# Altium PCB SG_CAN_Board.PcbDoc (part 1 of 2)
Units mil, origin at the board's own origin, x right, y up, seen from the top; angles counter-clockwise.
Board outline 3500 x 2800 mil, 4 copper layers (Top Layer, Int1 (GND), Int2 (PWR), Bottom Layer), stack 53.911 mil thick; 153 components, 115 nets, 475 pads, 128 vias.
Unrouted connection lines stored in the file: 15.
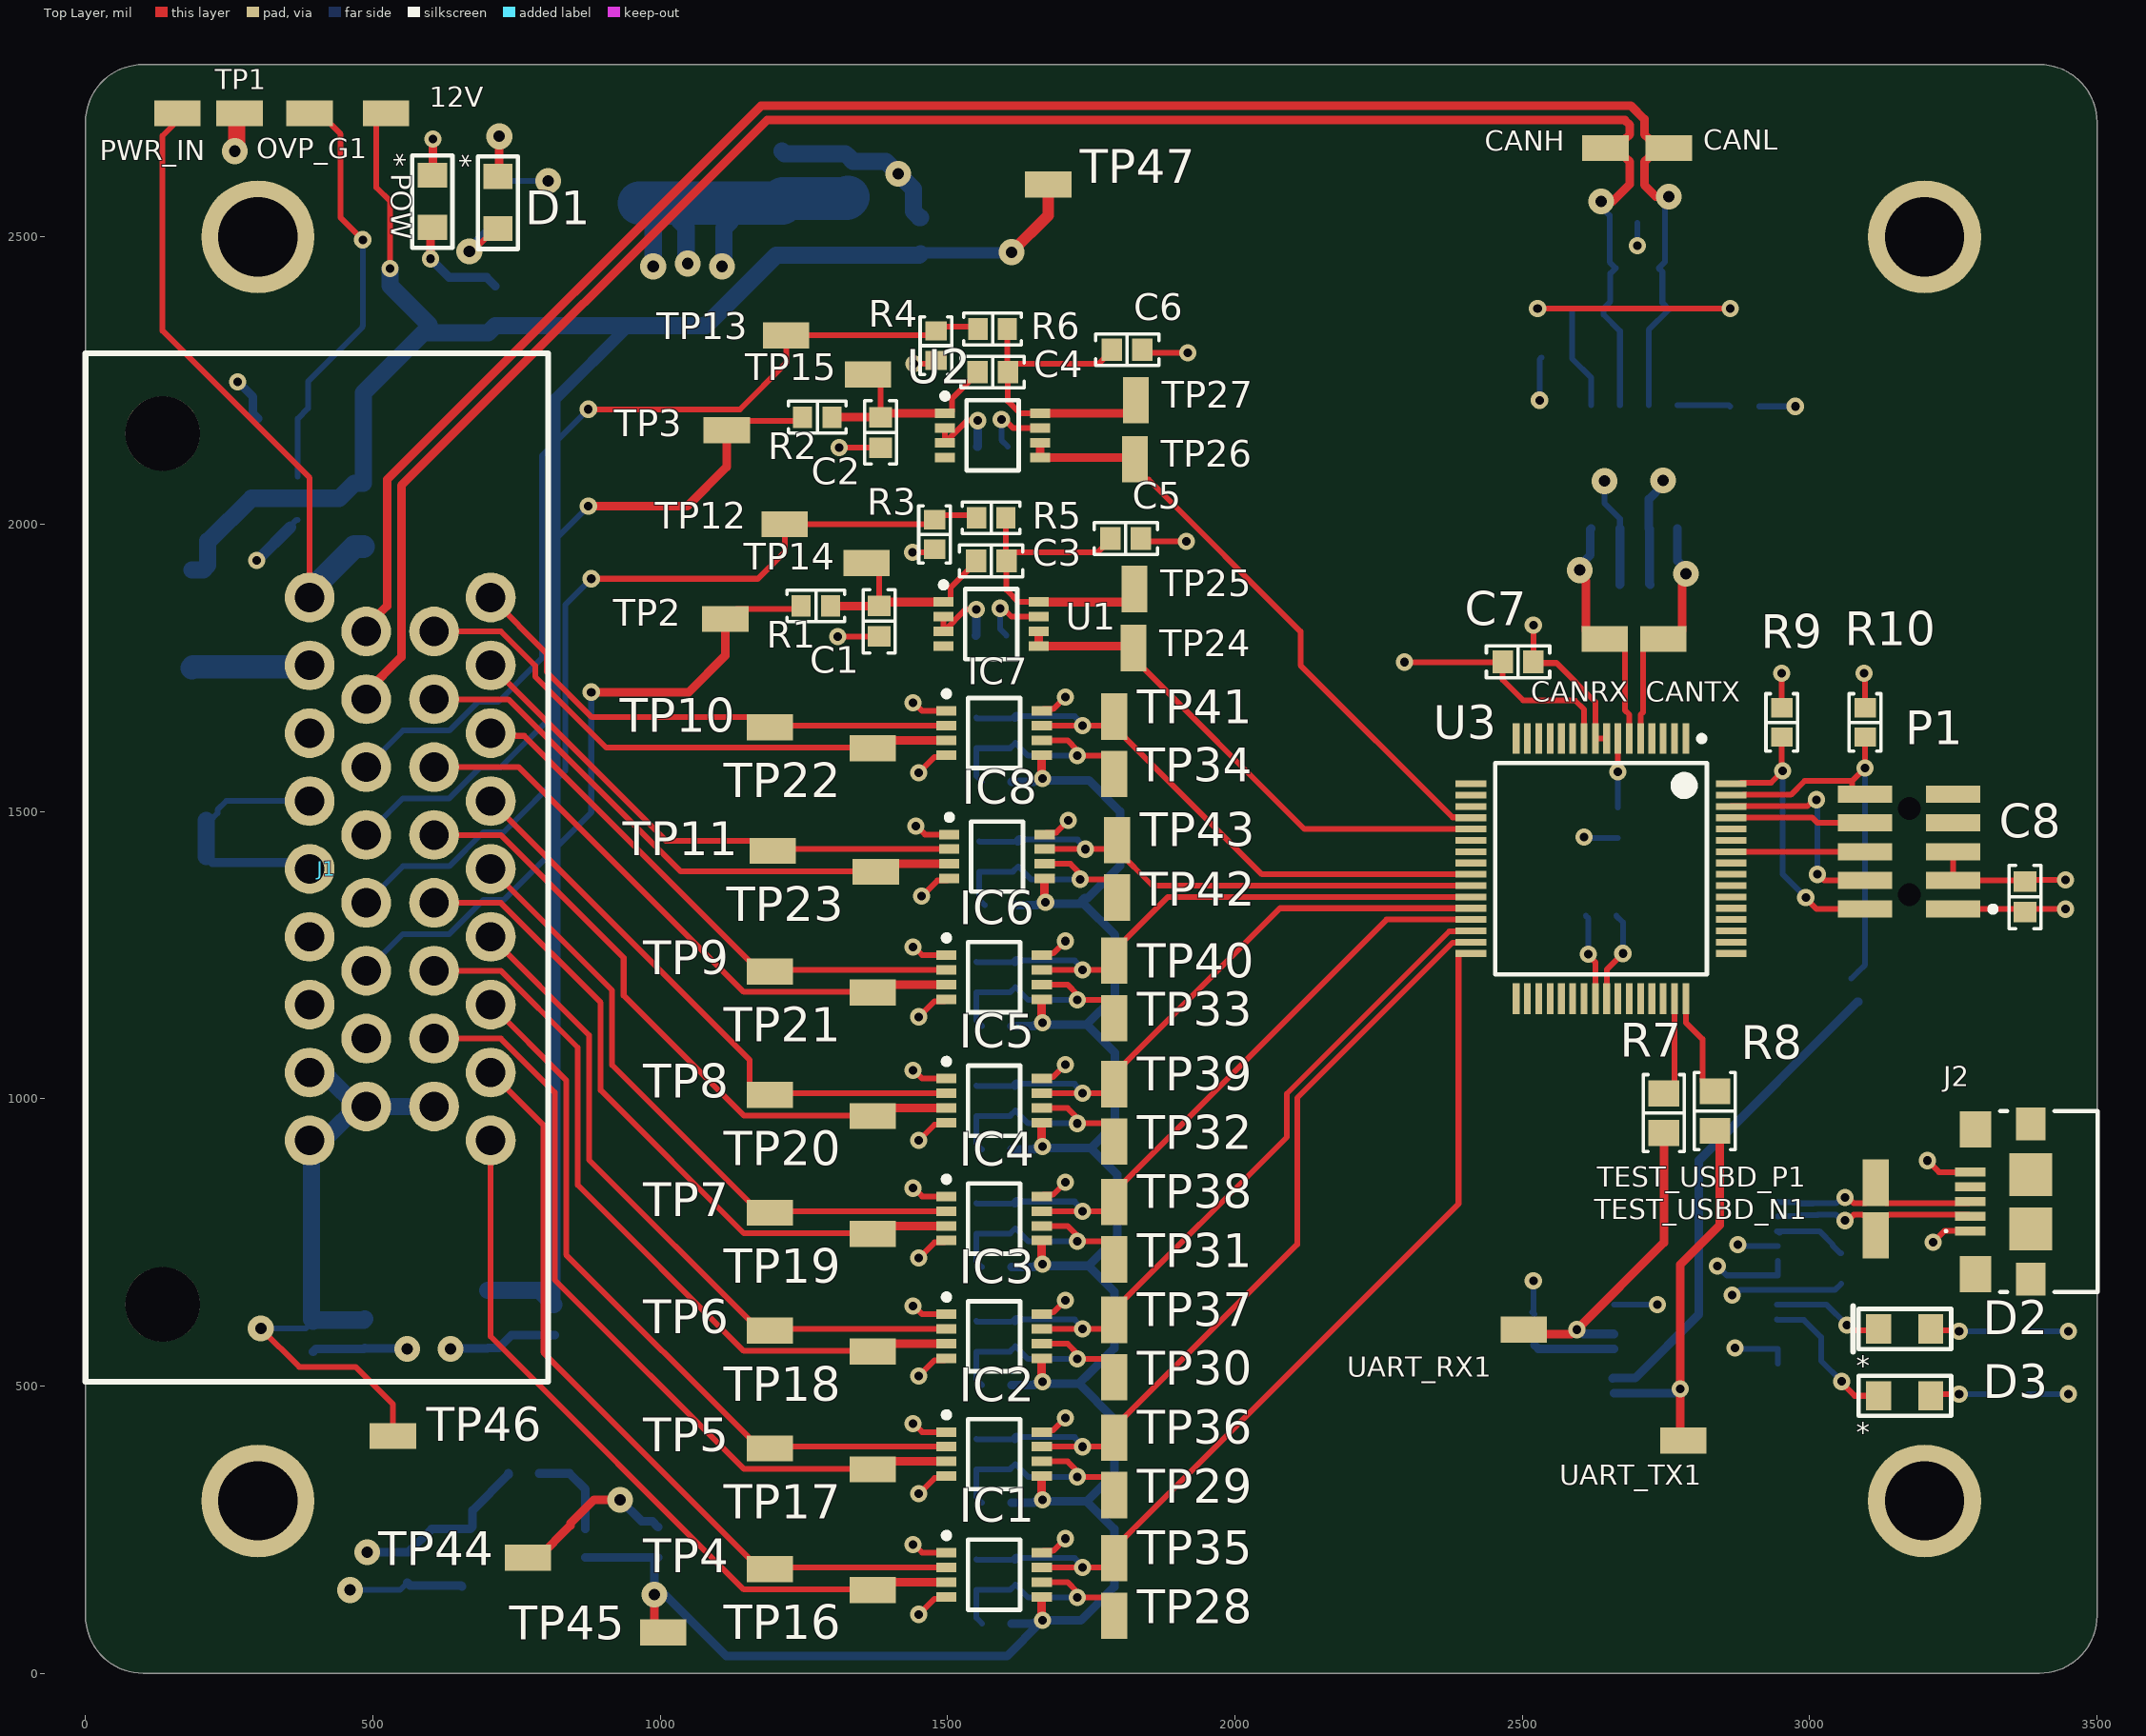
[diagram p0: Top Layer view]
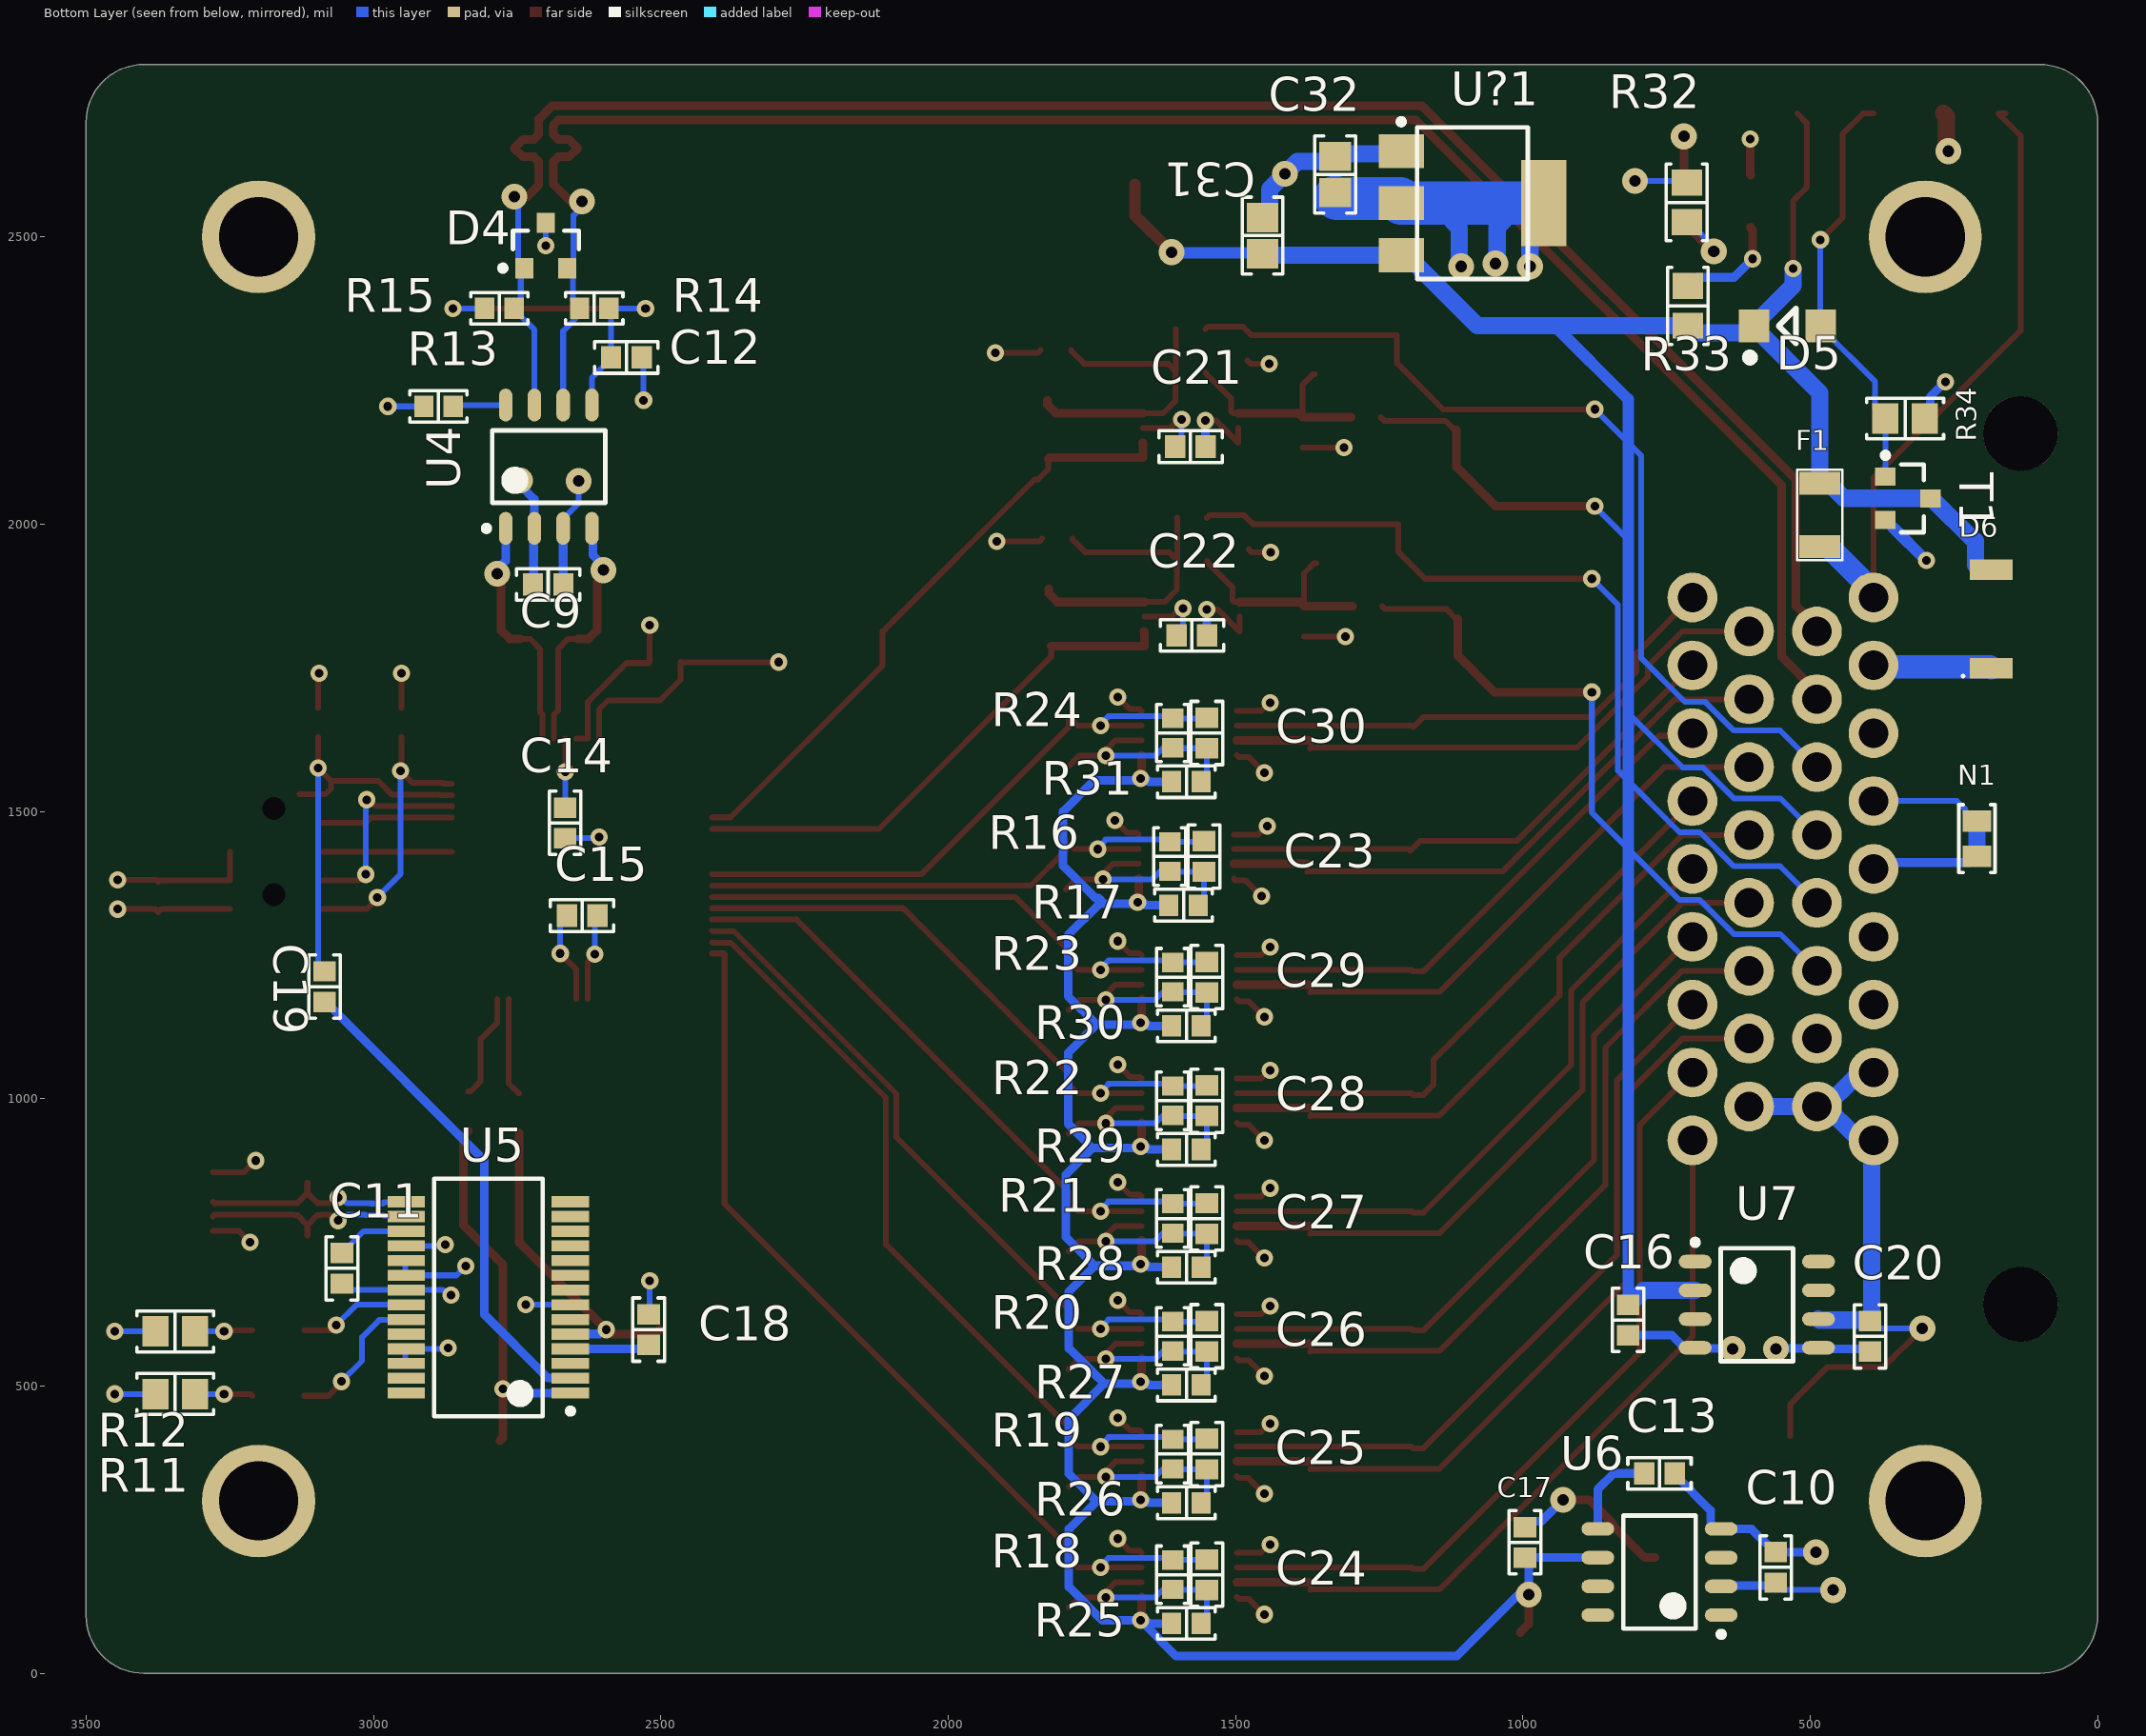
[diagram p1: Bottom Layer view, seen from below]
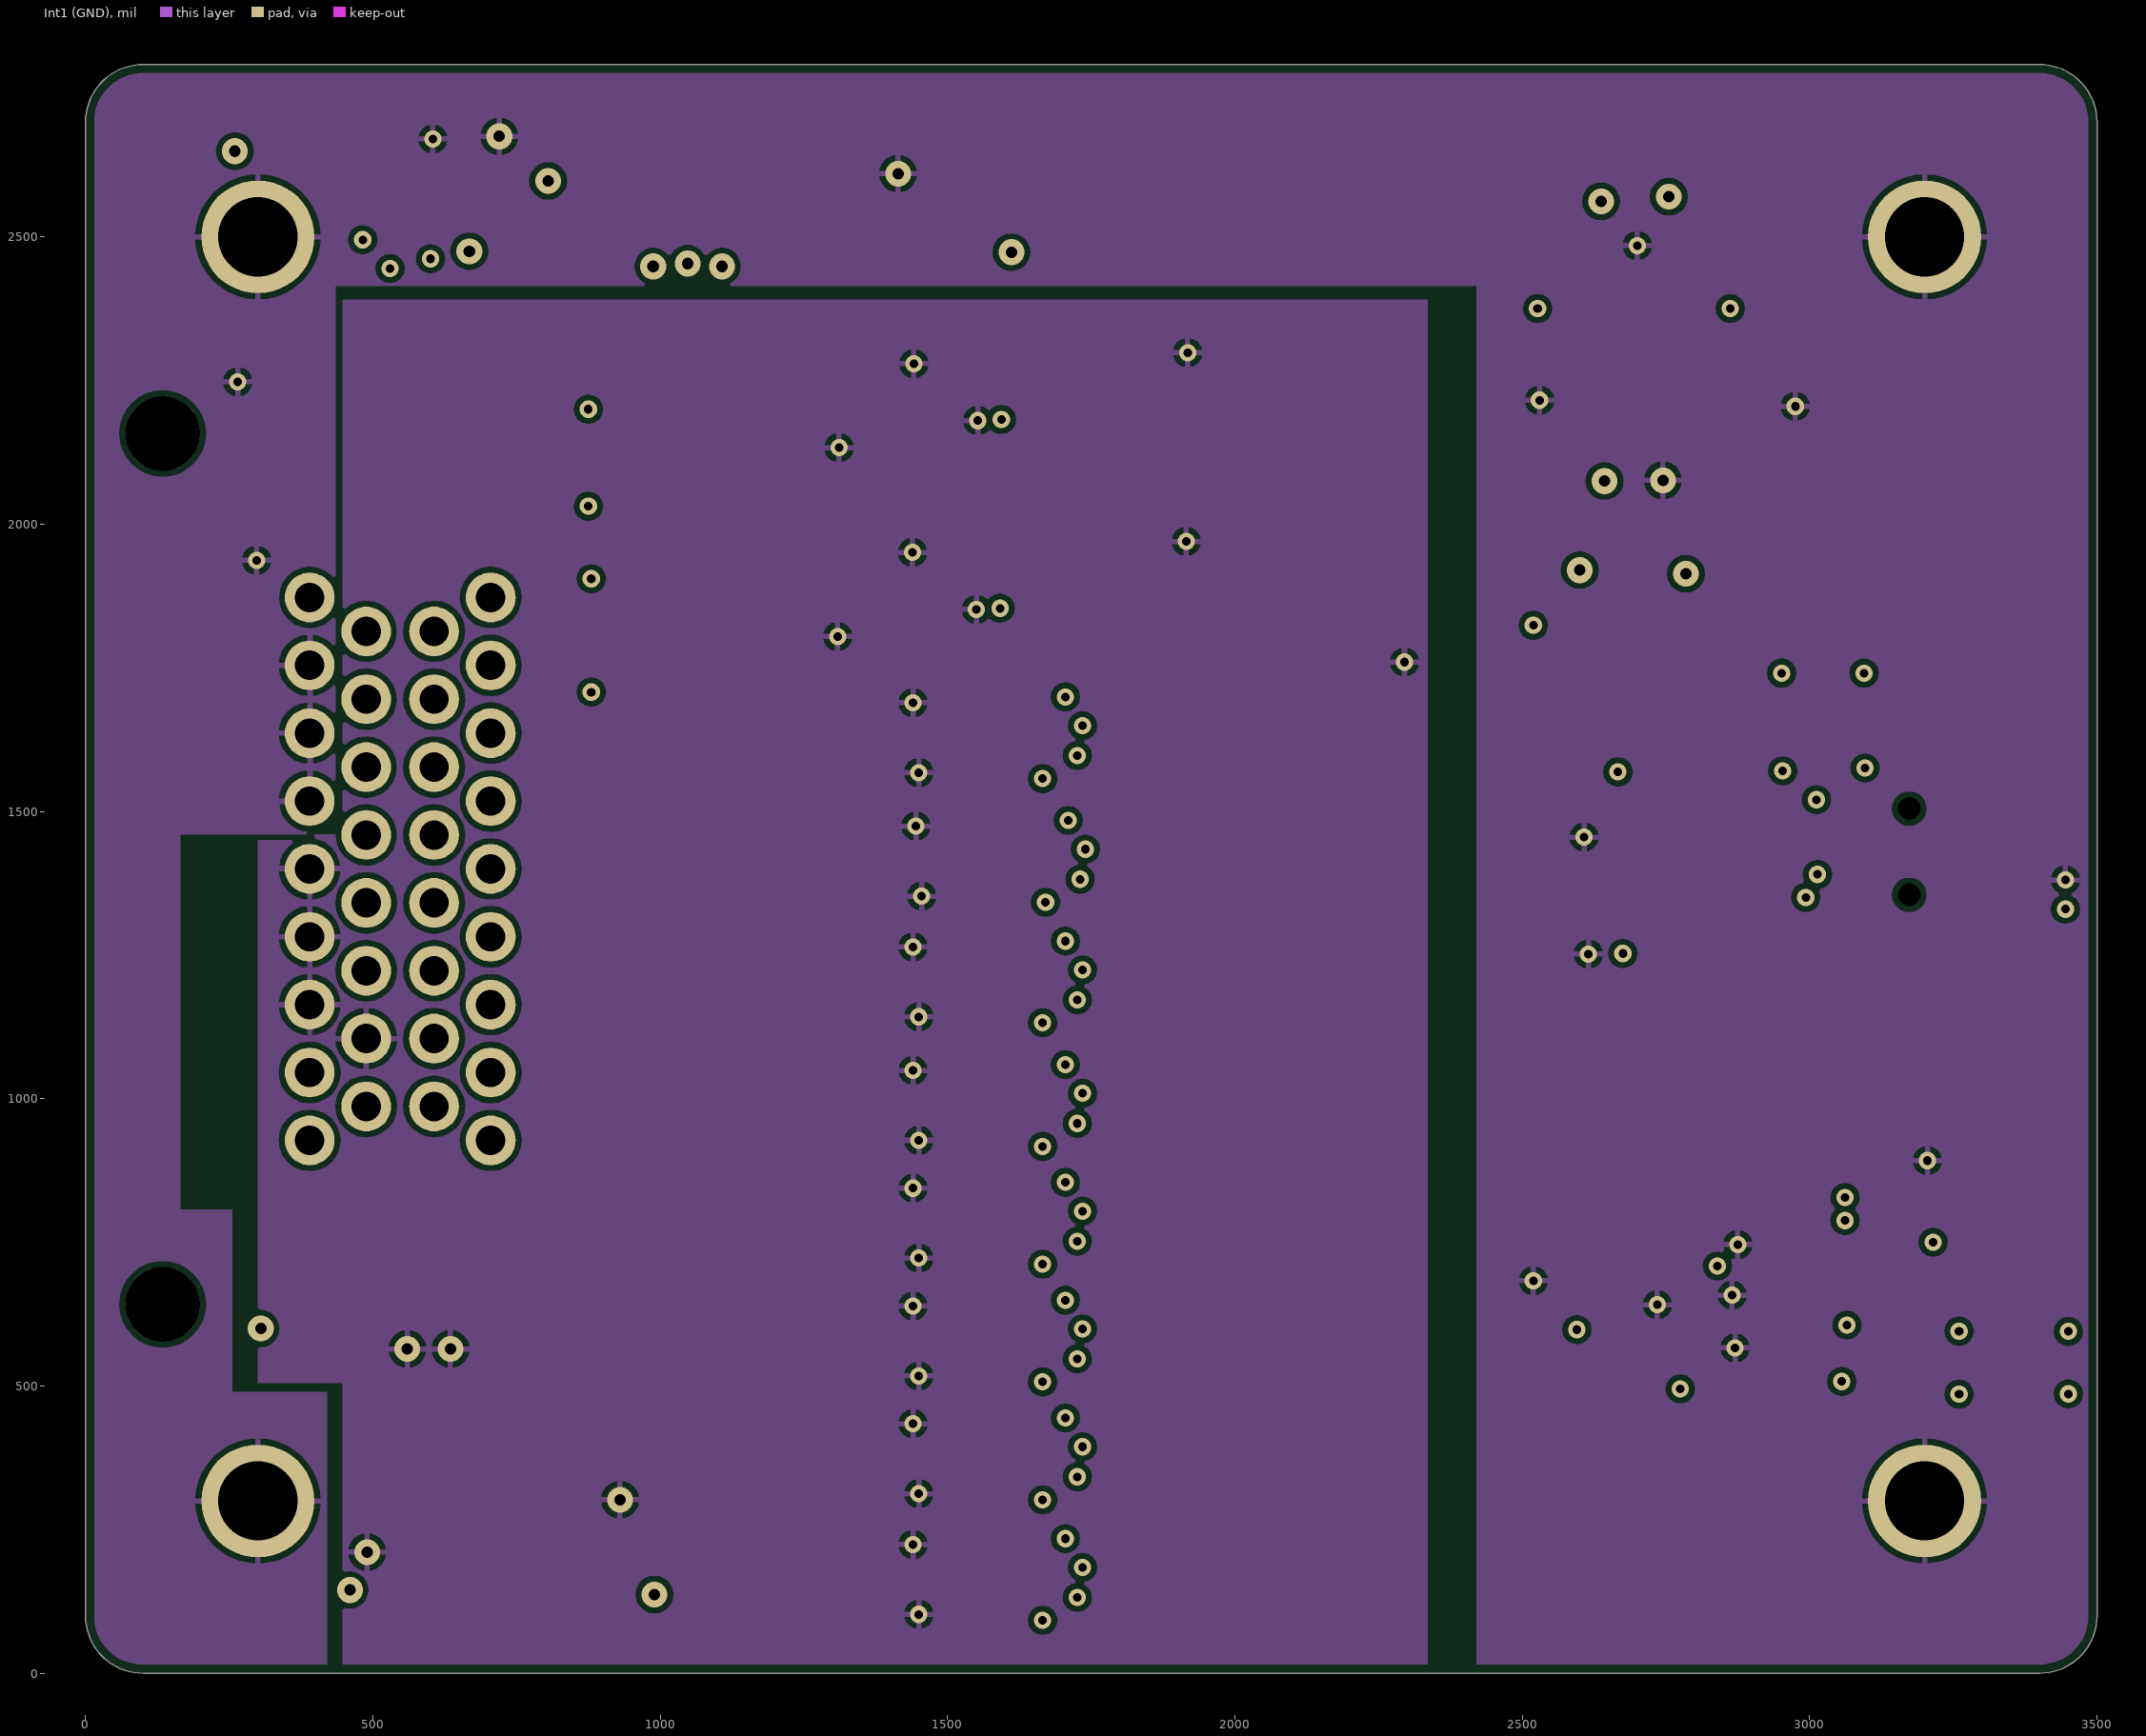
[diagram p2: Int1 (GND)]
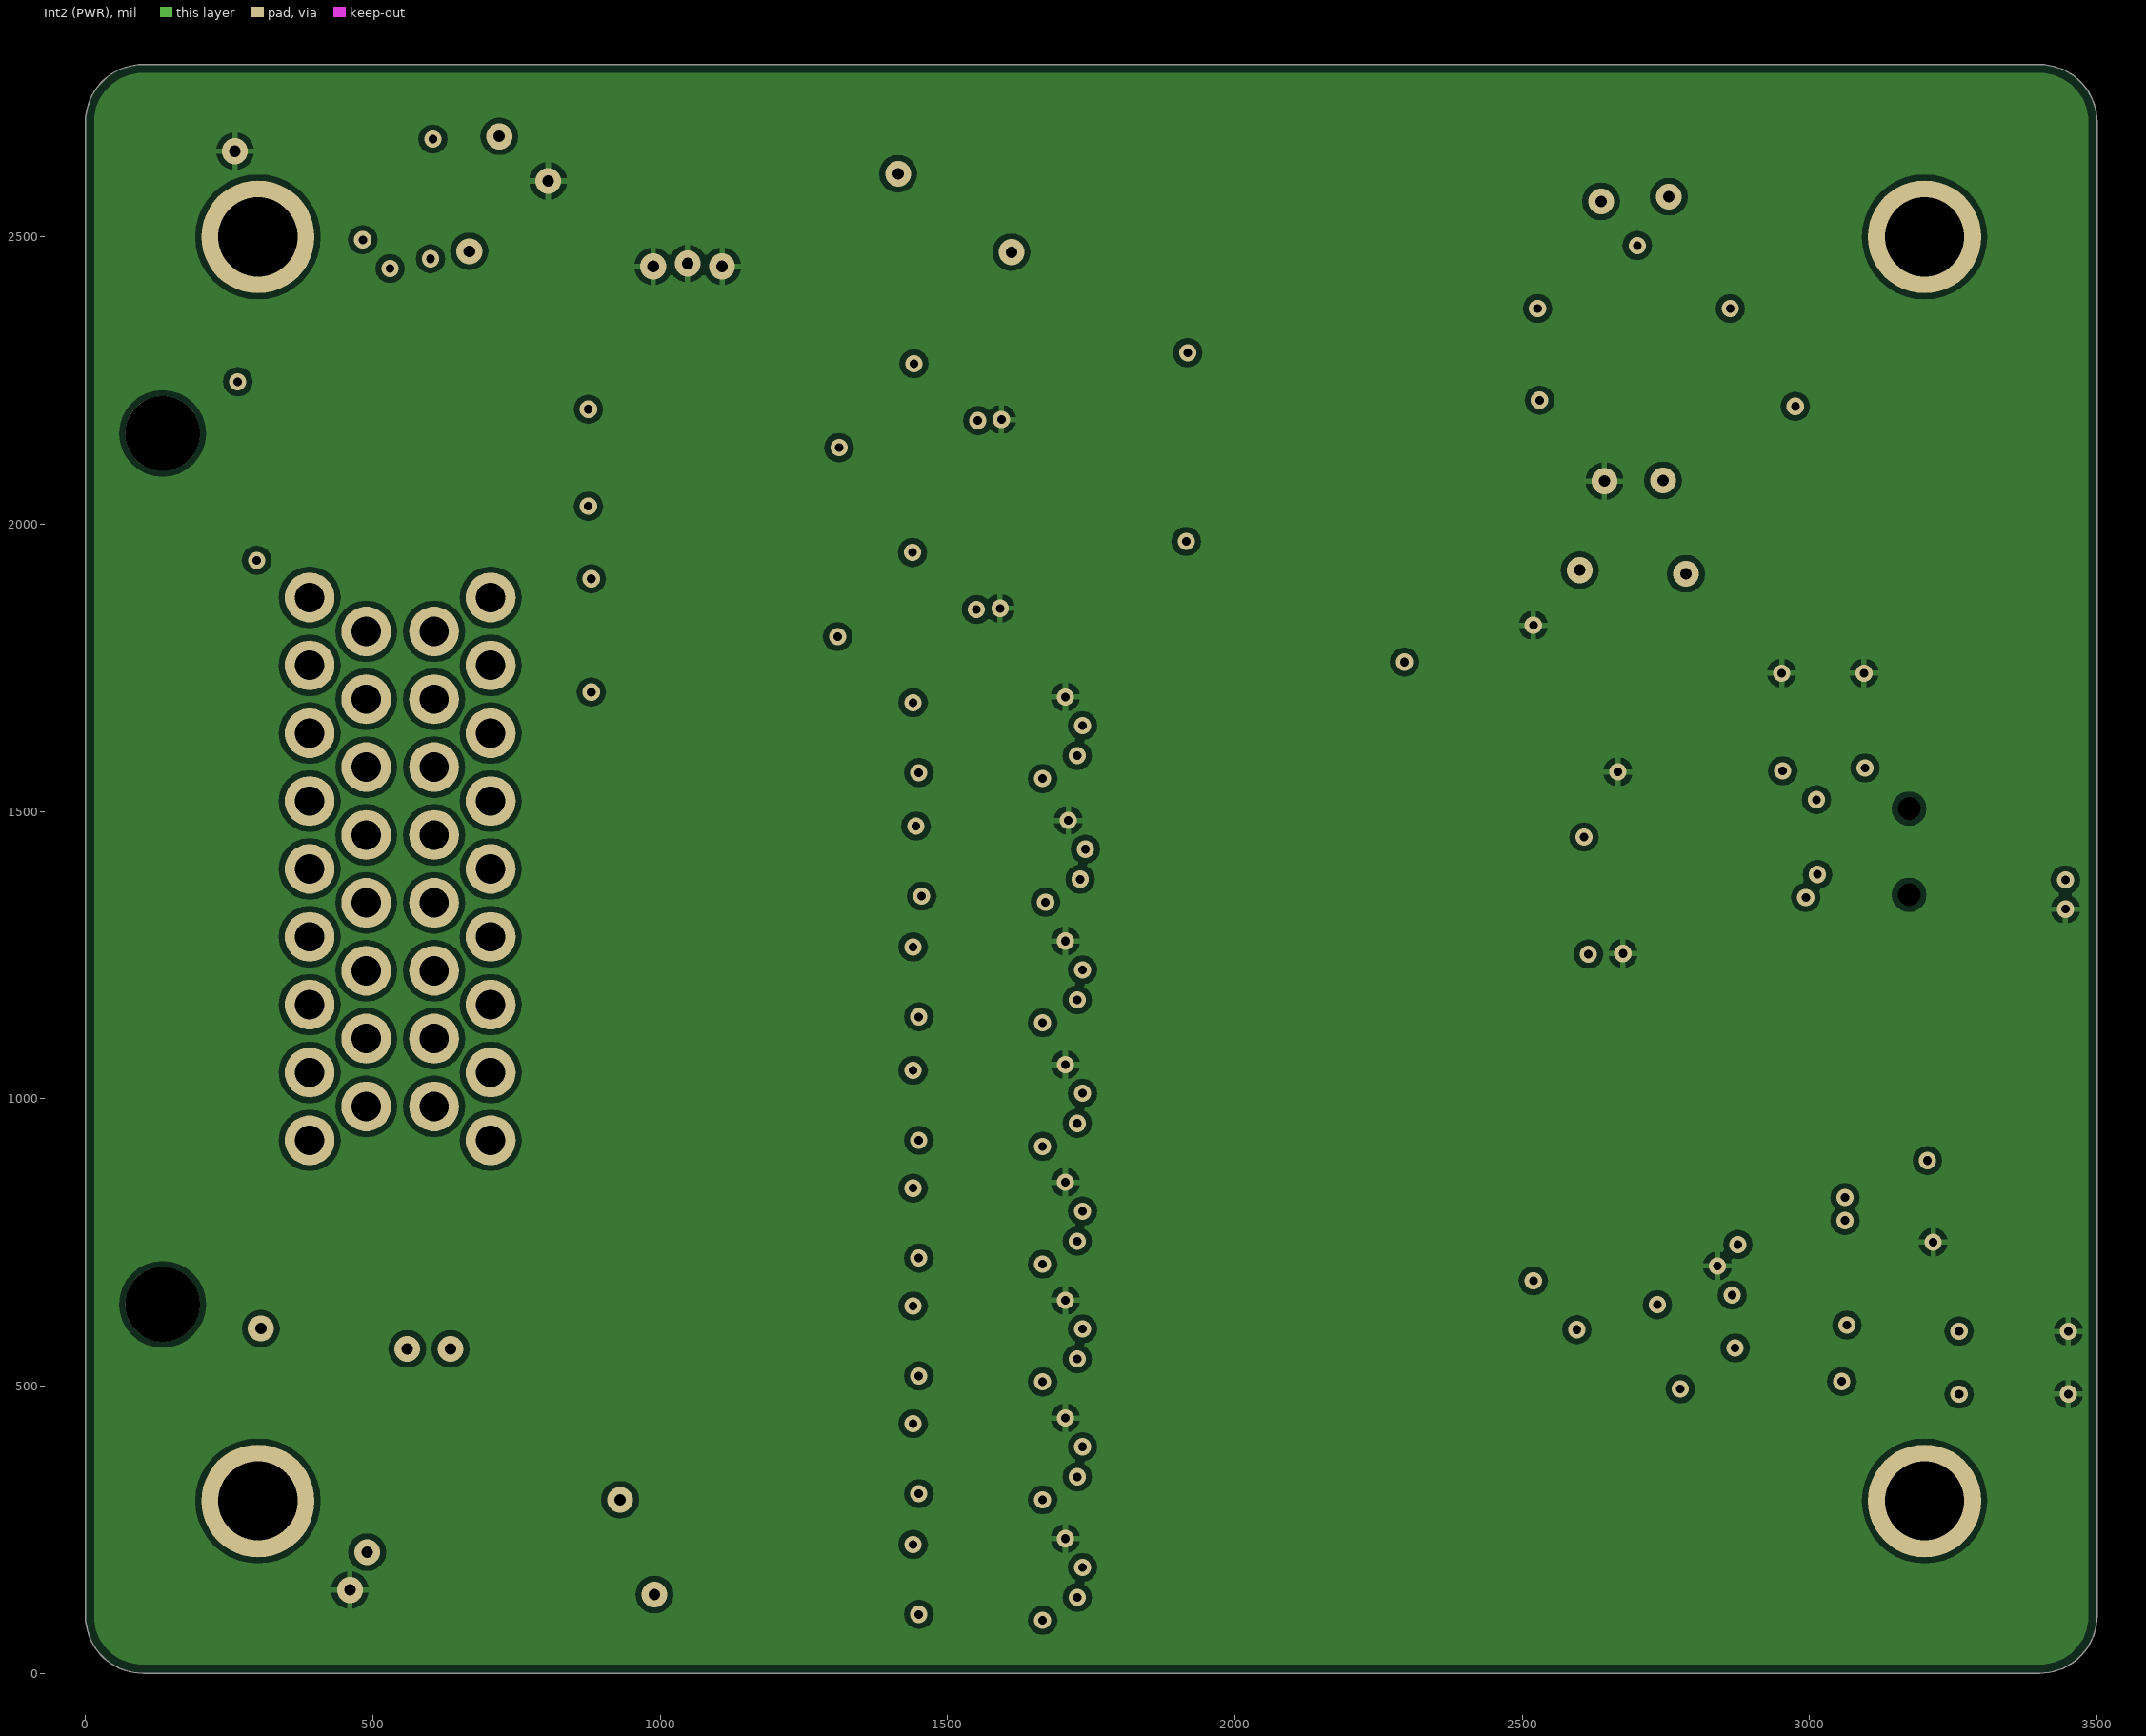
[diagram p3: Int2 (PWR)]
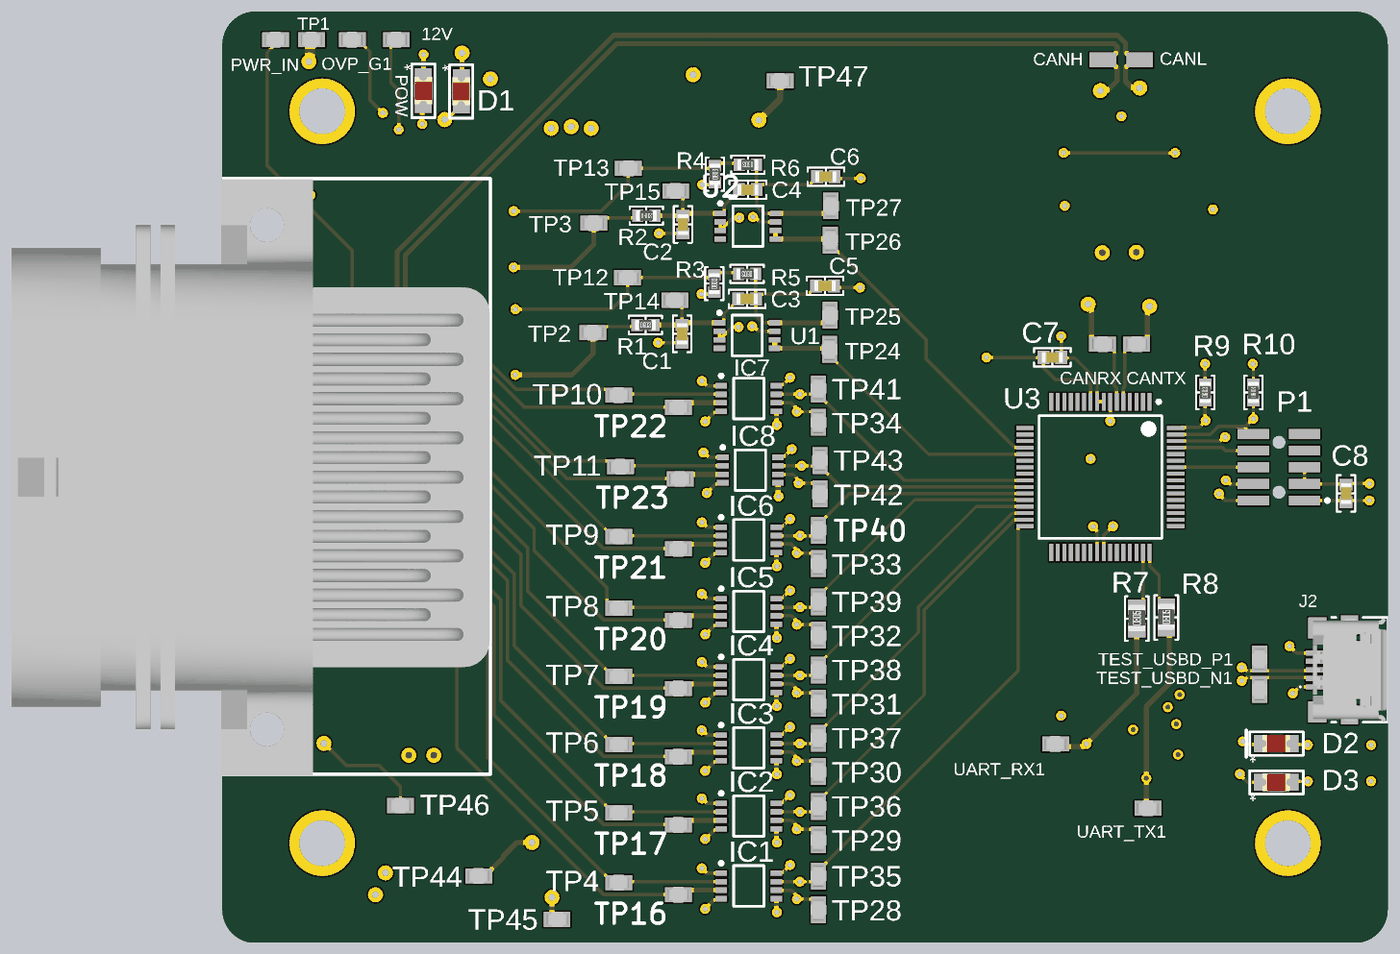
[diagram p5: 3D render of the assembled board from above, using the file's embedded part models]
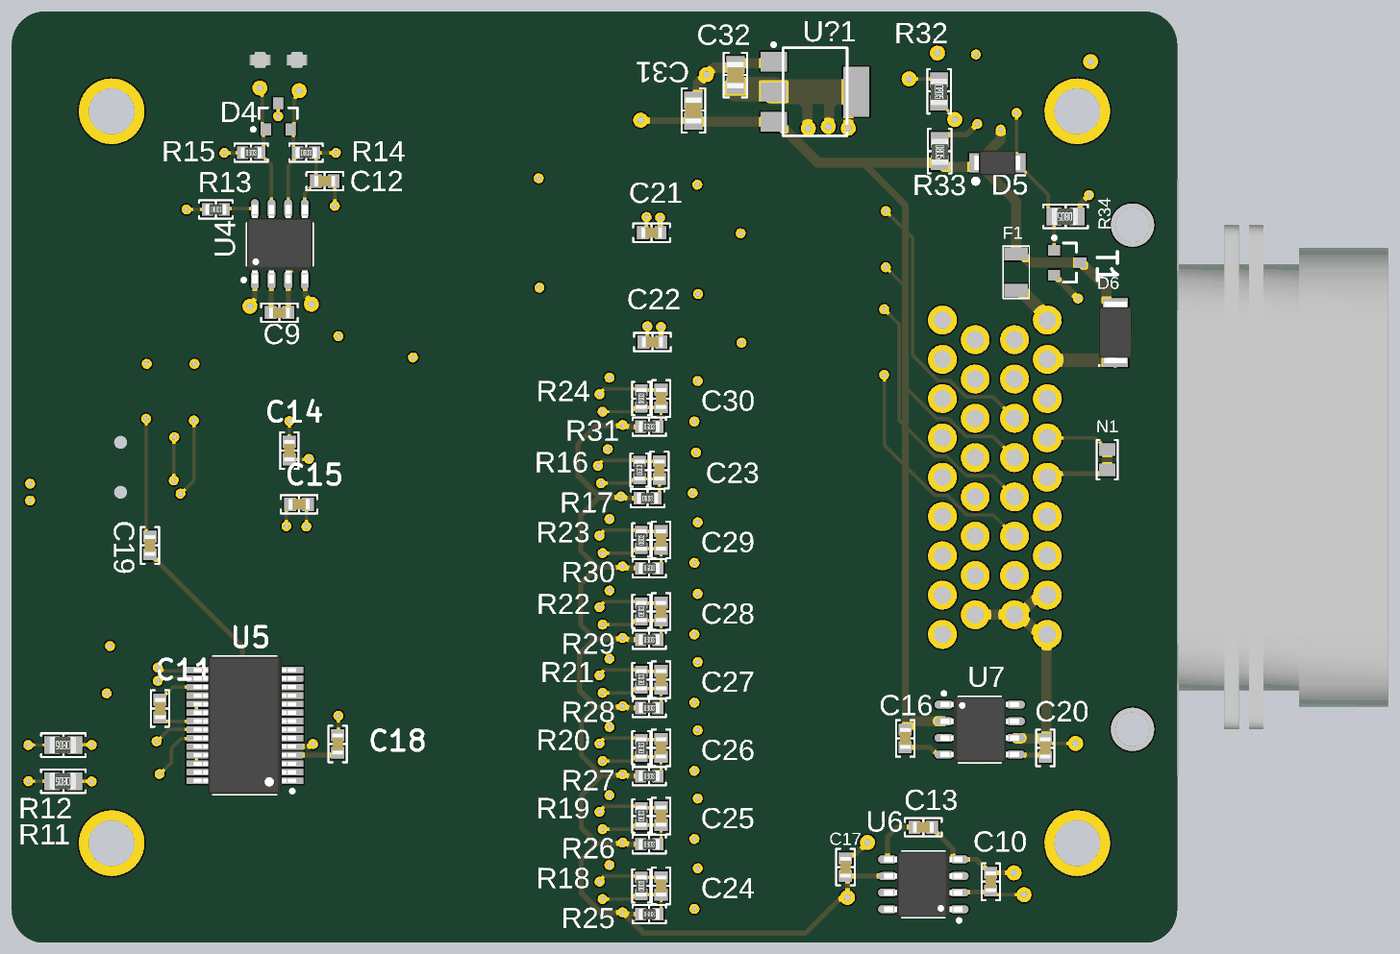
[diagram p6: 3D render of the assembled board from below, using the file's embedded part models]

## Layer stack, top to bottom
Top Solder: solder mask 1, SM-001, Dk 4
Top Layer: signal copper 1.3778
Dielectric 1: prepreg 5.1, PP-017, Dk 4.3
Dielectric 2: prepreg 5.1, PP-017, Dk 4.3
Int1 (GND): signal copper 1.3778
Dielectric 3: core 28, Core-039, Dk 4.8
Int2 (PWR): signal copper 1.3778
Dielectric 4: prepreg 5.1, PP-017, Dk 4.3
Dielectric 5: prepreg 5.1, PP-017, Dk 4.3
Bottom Layer: signal copper 1.3778
Bottom Solder: solder mask 1, SM-001, Dk 4

## Board outline
0,2700 cw(c100,2700) 100,2800 3400,2800 cw(c3400,2700) 3500,2700 3500,100 cw(c3400,100) 3400,0 100,0 cw(c100,100) 0,100

## Design rules (kind name [scope] priority, off if disabled: settings)
BoardOutlineClearance [All] p1: gap=15 ignorepadtopadclearanceinfootprint=FALSE
Clearance [InNetClass('All Nets')] p1: gap=10 ignorepadtopadclearanceinfootprint=FALSE except(6: Arc-THPad Track-THPad SMDPad-SMDPad; 8: Arc-Arc Arc-Track Arc-SMDPad Track-Track Track-SMDPad)
DiffPairsRouting [All] p1: maxlimit=100 minlimit=10 mostfreqgap=10 toplayer_minwidth=10 toplayer_maxwidth=100 toplayer_prefwidth=15 midlayer1_maxgap=10 midlayer1_minwidth=15 midlayer1_maxwidth=15 midlayer1_prefwidth=15 midlayer2_maxgap=10 midlayer2_minwidth=15 midlayer2_maxwidth=15 midlayer2_prefwidth=15 bottomlayer_minwidth=10 bottomlayer_maxwidth=100 bottomlayer_prefwidth=15 maxuncoupledlength=500
FabricationTestPointUsage TestPointUsage [All] p1: valid=0 allowmultiple=FALSE
FabricationTestPointUsage [All] p2: valid=0 allowmultiple=FALSE
FabricationTestpoint Testpoint [All] p1: side=3 testpointundercomponent=TRUE minsize=40 maxsize=100 preferedsize=60 minholesize=20 maxholesize=40 preferedholesize=32 testpointgrid=1 allowsidetop=TRUE allowsidebottom=TRUE usegrid=TRUE gridtolerance=0.01
FabricationTestpoint [All] p2: side=3 testpointundercomponent=TRUE minsize=40 maxsize=100 preferedsize=60 minholesize=0 maxholesize=40 preferedholesize=32 testpointgrid=1 allowsidetop=TRUE allowsidebottom=TRUE usegrid=TRUE gridtolerance=0.01
HoleSize [All] p1: absolutevalues=TRUE maxlimit=247 minlimit=10 maxpercent=80.000 minpercent=20.000
MatchedLengths "Schematic Matched Net Lengths" [InNet('D_N')] p1: tolerance=10 checknetsindiffpair=FALSE checkdiffpairvsdiffpair=TRUE checkxsignals=TRUE checkothers=TRUE
PasteMaskExpansion PasteMaskExpansion_1 [InComponent('P1')] p1: expansion=-150
PasteMaskExpansion [All] p2: expansion=0
PlaneClearance [All] p1: clearance=10
PlaneConnect [All] p1: planeconnectstyle=Relief reliefexpansion=15 reliefentries=4 reliefconductorwidth=10 reliefairgap=10
PolygonConnect [All] p1: connectstyle=Relief reliefconductorwidth=10 reliefentries=4 polygonreliefangle="90 Angle" airgapwidth=10
RoomDefinition SG_Amp8 [InComponentClass('SG_Amp8')] p1: confinementstyle=ConfineIn formatcopy=TRUE lockcomponents=FALSE outline 1115.98,40.27 1840,40.27 1840,256.85 1115.98,256.85
RoomDefinition SG_Amp7 [InComponentClass('SG_Amp7')] p2: confinementstyle=ConfineIn formatcopy=TRUE lockcomponents=FALSE outline 1115.98,250.27 1840,250.27 1840,466.85 1115.98,466.85
RoomDefinition SG_Amp6 [InComponentClass('SG_Amp6')] p3: confinementstyle=ConfineIn formatcopy=TRUE lockcomponents=FALSE outline 1115.98,455.27 1840,455.27 1840,671.85 1115.98,671.85
RoomDefinition SG_Amp5 [InComponentClass('SG_Amp5')] p4: confinementstyle=ConfineIn formatcopy=TRUE lockcomponents=FALSE outline 1115.98,660.27 1840,660.27 1840,876.85 1115.98,876.85
RoomDefinition SG_Amp4 [InComponentClass('SG_Amp4')] p5: confinementstyle=ConfineIn formatcopy=TRUE lockcomponents=FALSE outline 1115.98,865.27 1840,865.27 1840,1081.85 1115.98,1081.85
RoomDefinition SG_Amp3 [InComponentClass('SG_Amp3')] p6: confinementstyle=ConfineIn formatcopy=TRUE lockcomponents=FALSE outline 1115.98,1080.27 1840,1080.27 1840,1296.85 1115.98,1296.85
RoomDefinition SG_Amp2 [InComponentClass('SG_Amp2')] p7: confinementstyle=ConfineIn formatcopy=TRUE lockcomponents=FALSE outline 1120.98,1290.27 1845,1290.27 1845,1506.85 1120.98,1506.85
RoomDefinition SG_Amp1 [InComponentClass('SG_Amp1')] p8: confinementstyle=ConfineIn formatcopy=TRUE lockcomponents=FALSE outline 1115.98,1505.27 1840,1505.27 1840,1721.85 1115.98,1721.85
RoomDefinition U_ThermoAmp2 [InComponentClass('U_ThermoAmp2')] p9: confinementstyle=ConfineIn formatcopy=TRUE lockcomponents=FALSE outline 1060,1725 1955,1725 1955,2055 1060,2055
RoomDefinition U_ThermoAmp1 [InComponentClass('U_ThermoAmp1')] p10: confinementstyle=ConfineIn formatcopy=TRUE lockcomponents=FALSE outline 1062.47,2053.56 1957.47,2053.56 1957.47,2383.56 1062.47,2383.56
RoutingVias [All] p1: holewidth=15 width=30 viastyle="Through Hole" minholewidth=10 minwidth=20 maxholewidth=20 maxwidth=50
SilkToSolderMaskClearance SilkscreenOverComponentPads [IsPad] p1: minsilkscreentomaskgap=10 clearancetoexposedcopper=TRUE
SilkToSolderMaskClearance [IsPad] p2: minsilkscreentomaskgap=10 clearancetoexposedcopper=TRUE
SolderMaskExpansion [All] p1: expansion=5
UnRoutedNet [All] p1: checkbadconnections=TRUE
Width [All] p1: maxlimit=150 minlimit=8 preferedwidth=10
21 further rules are at their usual default settings.

## Classes and differential pairs
channel class SG_Amplifiers_LTC2053: SG_Amp1 SG_Amp2 SG_Amp3 SG_Amp4 SG_Amp5 SG_Amp6 SG_Amp7 SG_Amp8
net class TC-[1..2]: TC-1 TC-2 TC-3 TC-4 TC-5 TC-6 TC-7 TC-8
net class TC+[1..2]: TC+1 TC+2 TC+3 TC+4 TC+5 TC+6 TC+7 TC+8
component class SG_CAN_System: N1 TP44
component class SG_Amp8: C24 IC1 R18 R25 TP4 TP16 TP28 TP35
component class SG_Amp7: C25 IC2 R19 R26 TP5 TP17 TP29 TP36
component class SG_Amp6: C26 IC3 R20 R27 TP6 TP18 TP30 TP37
component class SG_Amp5: C27 IC4 R21 R28 TP7 TP19 TP31 TP38
component class SG_Amp4: C28 IC5 R22 R29 TP8 TP20 TP32 TP39
component class SG_Amp3: C29 IC6 R23 R30 TP9 TP21 TP33 TP44
component class SG_Amp2: C15 IC8 R16 R17 TP11 TP23 TP42 TP43
component class SG_Amp1: C30 IC7 R24 R31 TP10 TP22 TP34 TP41 TP$$$
channel class ThermocoupleAmplifiersAD8494: U_ThermoAmp1 U_ThermoAmp2
net class TCO[1..2]: TCO1 TCO2
net class SGO[1..8]: SGO1 SGO2 SGO3 SGO4 SGO5 SGO6 SGO7 SGO8
net class SG-[1..8]: SG-1 SG-2 SG-3 SG-4 SG-5 SG-6 SG-7 SG-8
net class SG+[1..8]: SG+1 SG+2 SG+3 SG+4 SG+5 SG+6 SG+7 SG+8
component class U_USB: C12 C31 C32 D2 J2 R7 R8 R11 R12 TEST_USBD_N1 TEST_USBD_P1 U6 UART_RX1 UART_TX1
component class U_ThermoAmp2: C1 C3 C5 C22 R1 R3 R10 TP2 TP12 TP14 TP24 TP25 U1
component class U_ThermoAmp1: C2 C4 C6 C31 R2 R4 R6 TP3 TP13 TP15 TP26 TP27 U4
component class U_SG_Power_Supplies: C10 C20 C31 C32 D2 R32 TP1 TP46 U6 U?1
component class U_RVP_OVP_LC: 12V D6 OVP_G1 POW PWR_IN R33 T1
component class U_MCU_MKE185F512VLH16: C7 C8 C14 C15 CANRX CANTX P1 R9 R10 U4
component class U_CAN_Tranceiver: C9 C12 CANRX CANTX D2 R14 R15 U4
component class U_36Pin_SuperSeal_Conn: F1 J1
differential pair D: +D_P -D_N
differential pair CAN: +CAN_P -CAN_N

## Components (designator, comment, footprint, x,y, rotation, side; value= is the part's Value field where it differs from the comment)
12V "RCU-0C" RCU-0C#1 522.68,2715 r90 top (schematic designator PWR_OUT1)
C1 "Capacitor MLCC 1000pf 16V CAP 0603/1608" "CAP 0603/1608" 1380.89,1831.07 r90 top value=1000pf (schematic designator C8)
C2 "Capacitor MLCC 1000pf 16V CAP 0603/1608" "CAP 0603/1608" 1383.36,2159.63 r90 top value=1000pf (schematic designator C8)
C3 "Capacitor MLCC 0.010uf 16V CAP 0603/1608" "CAP 0603/1608" 1575.89,1936.07 r0 top value=0.010uf (schematic designator C10)
C4 "Capacitor MLCC 0.010uf 16V CAP 0603/1608" "CAP 0603/1608" 1578.36,2264.63 r0 top value=0.010uf (schematic designator C10)
C5 "Capacitor MLCC 1000pf 16V CAP 0603/1608" "CAP 0603/1608" 1810,1975 r0 top value=1000pf (schematic designator C12)
C6 "Capacitor MLCC 1000pf 16V CAP 0603/1608" "CAP 0603/1608" 1812.47,2303.56 r0 top value=1000pf (schematic designator C12)
C7 "Capacitor MLCC 0.10uf 25V CAP 0603/1608" "CAP 0603/1608" 2492.65,1760.35 r0 top value=0.10uf (schematic designator C24)
C8 "Capacitor MLCC 0.10uf 16V CAP 0603/1608" "CAP 0603/1608" 3374.65,1351.26 r270 top value=0.10uf (schematic designator C6)
C9 "Capacitor MLCC 0.10uf 50V CAP 0603/1608" "CAP 0603/1608" 2696.07,1895 r180 bottom value=0.10uf (schematic designator C7)
C10 "Capacitor MLCC 1.0uf 25V CAP 0603/1608" "CAP 0603/1608" 560,184.37 r270 bottom value=1.0uf (schematic designator C13)
C11 "Capacitor MLCC 0.10uf 25V CAP 0603/1608" "CAP 0603/1608" 3055,704.8 r90 bottom value=0.10uf (schematic designator C20)
C12 "Capacitor MLCC 4700pf 50V CAP 0603/1608" "CAP 0603/1608" 2560.08,2290.16 r0 bottom value=4700pf (schematic designator C11)
C13 "Capacitor MLCC 1.0uf 25V CAP 0603/1608" "CAP 0603/1608" 762.38,347.91 r0 bottom value=1.0uf (schematic designator C14)
C14 "Capacitor MLCC 0.10uf 25V CAP 0603/1608" "CAP 0603/1608" 2666.54,1480 r90 bottom value=0.10uf (schematic designator C5)
C15 "Capacitor MLCC 100pf 25V CAP 0603/1608" "CAP 0603/1608" 2637.01,1318.58 r0 bottom value=100pf (schematic designator C23)
C16 "Capacitor MLCC 2.2uf 25V CAP 0603/1608" "CAP 0603/1608" 816.96,614.93 r90 bottom value=2.2uf (schematic designator C15)
C17 "Capacitor MLCC 22uf 16V CAP 0603/1608" "CAP 0603/1608" 996.36,227.91 r270 bottom value=22uf (schematic designator C16)
C18 "Capacitor MLCC 0.10uf 25V CAP 0603/1608" "CAP 0603/1608" 2521.14,598.23 r270 bottom value=0.10uf (schematic designator C21)
C19 "Capacitor MLCC 0.10uf 25V CAP 0603/1608" "CAP 0603/1608" 3085,1195.14 r90 bottom value=0.10uf (schematic designator C22)
C20 "Capacitor MLCC 2.2uf 25V CAP 0603/1608" "CAP 0603/1608" 396.03,586.46 r90 bottom value=2.2uf (schematic designator C17)
C21 "Capacitor MLCC 0.10uf 16V CAP 0603/1608" "CAP 0603/1608" 1578.36,2134.95 r0 bottom value=0.10uf (schematic designator C9)
C22 "Capacitor MLCC 0.10uf 16V CAP 0603/1608" "CAP 0603/1608" 1575.89,1806.39 r0 bottom value=0.10uf (schematic designator C9)
C23 "Capacitor MLCC 0.015uf 25V CAP 0603/1608" "CAP 0603/1608" 1555,1421.57 r90 bottom value=0.015uf (schematic designator C28)
C24 "Capacitor MLCC 0.015uf 25V CAP 0603/1608" "CAP 0603/1608" 1550,171.57 r90 bottom value=0.015uf (schematic designator C28)
C25 "Capacitor MLCC 0.015uf 25V CAP 0603/1608" "CAP 0603/1608" 1550,381.57 r90 bottom value=0.015uf (schematic designator C28)
C26 "Capacitor MLCC 0.015uf 25V CAP 0603/1608" "CAP 0603/1608" 1550,586.57 r90 bottom value=0.015uf (schematic designator C28)
C27 "Capacitor MLCC 0.015uf 25V CAP 0603/1608" "CAP 0603/1608" 1550,791.57 r90 bottom value=0.015uf (schematic designator C28)
C28 "Capacitor MLCC 0.015uf 25V CAP 0603/1608" "CAP 0603/1608" 1550,996.57 r90 bottom value=0.015uf
C29 "Capacitor MLCC 0.015uf 25V CAP 0603/1608" "CAP 0603/1608" 1550,1211.57 r90 bottom value=0.015uf (schematic designator C28)
C30 "Capacitor MLCC 0.015uf 25V CAP 0603/1608" "CAP 0603/1608" 1550,1636.57 r90 bottom value=0.015uf (schematic designator C28)
C31 "Capacitor MLCC 2.2uf 25V CAP 0805/2012" "CAP 0805/2012" 1453.01,2502.32 r270 bottom value=2.2uf (schematic designator C18)
C32 "Capacitor MLCC 2.2uf 25V CAP 0805/2012" "CAP 0805/2012" 1326.81,2608.66 r270 bottom value=2.2uf (schematic designator C19)
CANH "RCU-0C" RCU-0C#2 2644.63,2654.43 r270 bottom (schematic designator TEST_CANN1)
CANL "RCU-0C" RCU-0C#2 2755,2654.43 r270 bottom (schematic designator TEST_CANP1)
CANRX "RCU-0C" RCU-0C#1 2643.65,1800.35 r270 top (schematic designator TEST_CANRX1)
CANTX "RCU-0C" RCU-0C#1 2745.28,1800.35 r270 top (schematic designator TEST_CANTX1)
D1 "LED" 0805_LED 717.59,2560 r90 top value=Green (schematic designator D4)
D2 "" 0805_LED 3165.28,599.37 r180 top value=Red (schematic designator D3)
D3 "" 0805_LED 3165.28,482.99 r180 top value=Green (schematic designator D1)
D4 "NUP1105LT1G" "SOT-23 (TO-236)" 2700,2485 r90 bottom value=TVS_24V (schematic designator D2)
D5 "DDZ9701-7" SOD123F 540,2345 r0 bottom value=14Vz (schematic designator D6)
D6 "DIODE" SOD-128 185,1835 r90 bottom value=5A (schematic designator D5)
F1 "1A" "PTC Fuse 1206/3216" 483.31,2016 r90 bottom
IC1 "" MSOP-8 1580.98,171.57 r0 top (schematic designator IC5)
IC2 "" MSOP-8 1580.98,381.57 r0 top (schematic designator IC5)
IC3 "" MSOP-8 1580.98,586.57 r0 top (schematic designator IC5)
IC4 "" MSOP-8 1580.98,791.57 r0 top (schematic designator IC5)
IC5 "" MSOP-8 1580.98,996.57 r0 top
IC6 "" MSOP-8 1580.98,1211.57 r0 top (schematic designator IC5)
IC7 "" MSOP-8 1580.98,1636.57 r0 top (schematic designator IC5)
IC8 "" MSOP-8 1585.98,1421.57 r0 top (schematic designator IC5)
J1 "CONN Superseal 34POS" "Superseal 34POS" 704.96,1872.44 r270 top locked value=CONN
J2 "1981568-1" TECO-1981568-5_V 3279.69,820.98 r90 top locked value=CONN
N1 "" Net_Tie 210,1452.71 r90 bottom
OVP_G1 "RCU-0C" RCU-0C#1 390,2715 r90 top
P1 "5103309-1" HDR2X5_SMT 3173.23,1430 r90 top value=CONN
POW "LED" 0805_LED 603.58,2561.92 r90 top value=Green (schematic designator POWER1)
PWR_IN "RCU-0C" RCU-0C#1 160,2715 r90 top (schematic designator PWR_IN1)
R1 "Resistor 10k 0603 1/10W 10%" "RES 0603/1608" 1270.89,1857.65 r0 top value=10k (schematic designator R6)
R2 "Resistor 10k 0603 1/10W 10%" "RES 0603/1608" 1273.36,2186.21 r0 top value=10k (schematic designator R6)
R3 "Resistor 1.0M 0603 1/10W 5%" "RES 0603/1608" 1477.3,1982.15 r90 top value=1.0M (schematic designator R10)
R4 "Resistor 1.0M 0603 1/10W 5%" "RES 0603/1608" 1479.77,2310.71 r90 top value=1.0M (schematic designator R10)
R5 "Resistor 10k 0603 1/10W 10%" "RES 0603/1608" 1575.89,2011.07 r180 top value=10k (schematic designator R11)
R6 "Resistor 10k 0603 1/10W 10%" "RES 0603/1608" 1578.36,2339.63 r180 top value=10k (schematic designator R11)
R7 "Resistor 1.0k 0805 1/4W 1%" "RES 0805/2012" 2746.27,975 r90 top value=1.0k
R8 "Resistor 1.0k 0805 1/4W 1%" "RES 0805/2012" 2835,978.46 r90 top value=1.0k (schematic designator R9)
R9 "Resistor 10k 0603 1/10W 1%" "RES 0603/1608" 2951.51,1654.88 r90 top value=10k (schematic designator R4)
R10 "Resistor 10k 0603 1/10W 5%" "RES 0603/1608" 3096.46,1654.88 r90 top value=10k (schematic designator R5)
R11 "Resistor 1.0k 0805 1/4W 1%" "RES 0805/2012" 3345,486.26 r0 bottom value=1.0k (schematic designator R16)
R12 "Resistor 1.0k 0805 1/4W 1%" "RES 0805/2012" 3345,595 r0 bottom value=1.0k (schematic designator R15)
R13 "Resistor 100 0603 1/10W 10%" "RES 0603/1608" 2887.01,2205 r180 bottom value=100 (schematic designator R8)
R14 "Resistor 62 0603 1/10W 5%" "RES 0603/1608" 2616.03,2375.64 r180 bottom value=62 (schematic designator R12)
R15 "Resistor 62 0603 1/10W 5%" "RES 0603/1608" 2781.03,2375.64 r180 bottom value=62 (schematic designator R13)
R16 "Resistor 10k 0603 1/10W 1%" "RES 0603/1608" 1614.53,1421.57 r90 bottom value=10k (schematic designator R20)
R17 "Resistor 10 0603 1/10W 1%" "RES 0603/1608" 1590.51,1336.85 r180 bottom value=10 (schematic designator R24)
R18 "Resistor 10k 0603 1/10W 1%" "RES 0603/1608" 1609.53,171.57 r90 bottom value=10k (schematic designator R20)
R19 "Resistor 10k 0603 1/10W 1%" "RES 0603/1608" 1609.53,381.57 r90 bottom value=10k (schematic designator R20)
R20 "Resistor 10k 0603 1/10W 1%" "RES 0603/1608" 1609.53,586.57 r90 bottom value=10k
R21 "Resistor 10k 0603 1/10W 1%" "RES 0603/1608" 1609.53,791.57 r90 bottom value=10k (schematic designator R20)
R22 "Resistor 10k 0603 1/10W 1%" "RES 0603/1608" 1609.53,996.57 r90 bottom value=10k (schematic designator R20)
R23 "Resistor 10k 0603 1/10W 1%" "RES 0603/1608" 1609.53,1211.57 r90 bottom value=10k (schematic designator R20)
R24 "Resistor 10k 0603 1/10W 1%" "RES 0603/1608" 1609.53,1636.57 r90 bottom value=10k (schematic designator R20)
R25 "Resistor 10 0603 1/10W 1%" "RES 0603/1608" 1585.51,86.85 r180 bottom value=10 (schematic designator R24)
R26 "Resistor 10 0603 1/10W 1%" "RES 0603/1608" 1585.51,296.85 r180 bottom value=10 (schematic designator R24)
R27 "Resistor 10 0603 1/10W 1%" "RES 0603/1608" 1585.51,501.85 r180 bottom value=10 (schematic designator R24)
R28 "Resistor 10 0603 1/10W 1%" "RES 0603/1608" 1585.51,706.85 r180 bottom value=10 (schematic designator R24)
R29 "Resistor 10 0603 1/10W 1%" "RES 0603/1608" 1585.51,911.85 r180 bottom value=10 (schematic designator R24)
R30 "Resistor 10 0603 1/10W 1%" "RES 0603/1608" 1585.51,1126.85 r180 bottom value=10 (schematic designator R24)
R31 "Resistor 10 0603 1/10W 1%" "RES 0603/1608" 1585.51,1551.85 r180 bottom value=10 (schematic designator R24)
R32 "Resistor 470 0805 1/10W 1%" "RES 0805/2012" 715,2560 r270 bottom value=470 (schematic designator R14)
R33 "Resistor 470 0805 1/10W 1%" "RES 0805/2012" 712.89,2380 r270 bottom value=470 (schematic designator R34)
R34 "Resistor 47k 0805 1/10W 1%" "RES 0805/2012" 335,2183.78 r0 bottom value=47k (schematic designator R33)
T1 "DMG2302UK-7" SOT23-3 330,2045 r180 bottom value=N_Channel
TEST_USBD_N1 "RCU-0C" RCU-0C#1 3115,762.29 r180 top
TEST_USBD_P1 "RCU-0C" RCU-0C#1 3115,853.76 r180 top
TP1 "RCU-0C" RCU-0C#1 268.07,2715 r90 top value=CONN (schematic designator TP47)
TP2 "RCU-0C" RCU-0C#1 1113.17,1835 r90 top value=CONN (schematic designator TP38)
TP3 "RCU-0C" RCU-0C#1 1115.64,2163.56 r90 top value=CONN (schematic designator TP38)
TP4 "RCU-0C" RCU-0C#1 1190.98,181.57 r90 top value=CONN (schematic designator TP5)
TP5 "RCU-0C" RCU-0C#1 1190.98,391.57 r90 top value=CONN
TP6 "RCU-0C" RCU-0C#1 1190.98,596.57 r90 top value=CONN (schematic designator TP5)
TP7 "RCU-0C" RCU-0C#1 1190.98,801.57 r90 top value=CONN (schematic designator TP5)
TP8 "RCU-0C" RCU-0C#1 1190.98,1006.57 r90 top value=CONN (schematic designator TP5)
TP9 "RCU-0C" RCU-0C#1 1190.98,1221.57 r90 top value=CONN (schematic designator TP5)
TP10 "RCU-0C" RCU-0C#1 1190.98,1646.57 r90 top value=CONN (schematic designator TP5)
TP11 "RCU-0C" RCU-0C#1 1195.98,1431.57 r90 top value=CONN (schematic designator TP5)
TP12 "RCU-0C" RCU-0C#1 1216.71,2000 r270 top value=CONN (schematic designator TP39)
TP13 "RCU-0C" RCU-0C#1 1219.18,2328.56 r270 top value=CONN (schematic designator TP39)
TP14 "RCU-0C" RCU-0C#1 1359.17,1932.15 r90 top value=CONN (schematic designator TP41)
TP15 "RCU-0C" RCU-0C#1 1361.64,2260.71 r90 top value=CONN (schematic designator TP41)
TP16 "RCU-0C" RCU-0C#1 1370,145 r90 top value=CONN (schematic designator TP14)
TP17 "RCU-0C" RCU-0C#1 1370,355 r90 top value=CONN (schematic designator TP14)
TP18 "RCU-0C" RCU-0C#1 1370,560 r90 top value=CONN (schematic designator TP14)
TP19 "RCU-0C" RCU-0C#1 1370,765 r90 top value=CONN (schematic designator TP14)
TP20 "RCU-0C" RCU-0C#1 1370,970 r90 top value=CONN (schematic designator TP14)
TP21 "RCU-0C" RCU-0C#1 1370,1185 r90 top value=CONN (schematic designator TP14)
TP22 "RCU-0C" RCU-0C#1 1370,1610 r90 top value=CONN (schematic designator TP14)
TP23 "RCU-0C" RCU-0C#1 1375,1395 r90 top value=CONN (schematic designator TP14)
TP24 "RCU-0C" RCU-0C#1 1823.48,1784.6 r180 top value=CONN (schematic designator TP42)
TP25 "RCU-0C" RCU-0C#1 1825,1887.18 r180 top value=CONN (schematic designator TP43)
TP26 "RCU-0C" RCU-0C#1 1825.95,2113.16 r180 top value=CONN (schematic designator TP42)
TP27 "RCU-0C" RCU-0C#1 1827.47,2215.74 r180 top value=CONN (schematic designator TP43)
TP28 "RCU-0C" RCU-0C#1 1790,100.27 r180 top value=CONN
TP29 "RCU-0C" RCU-0C#1 1790,310.27 r180 top value=CONN (schematic designator TP28)
TP30 "RCU-0C" RCU-0C#1 1790,515.27 r180 top value=CONN (schematic designator TP28)
TP31 "RCU-0C" RCU-0C#1 1790,720.27 r180 top value=CONN (schematic designator TP28)
TP32 "RCU-0C" RCU-0C#1 1790,925.27 r180 top value=CONN (schematic designator TP28)
TP33 "RCU-0C" RCU-0C#1 1790,1140.27 r180 top value=CONN (schematic designator TP28)
TP34 "RCU-0C" RCU-0C#1 1790,1565.27 r180 top value=CONN (schematic designator TP28)
TP35 "RCU-0C" RCU-0C#1 1790,200.27 r0 top value=CONN (schematic designator TP30)
TP36 "RCU-0C" RCU-0C#1 1790,410.27 r0 top value=CONN (schematic designator TP30)
TP37 "RCU-0C" RCU-0C#1 1790,615.27 r0 top value=CONN (schematic designator TP30)
TP38 "RCU-0C" RCU-0C#1 1790,820.27 r0 top value=CONN (schematic designator TP30)
TP39 "RCU-0C" RCU-0C#1 1790,1025.27 r0 top value=CONN (schematic designator TP30)
TP40 "RCU-0C" RCU-0C#1 1790,1240.27 r0 top value=CONN (schematic designator TP30)
TP41 "RCU-0C" RCU-0C#1 1790,1665.27 r0 top value=CONN (schematic designator TP30)
TP42 "RCU-0C" RCU-0C#1 1795,1350.27 r180 top value=CONN (schematic designator TP28)
TP43 "RCU-0C" RCU-0C#1 1795,1450.27 r0 top value=CONN (schematic designator TP30)
TP44 "RCU-0C" RCU-0C#1 770,201.34 r90 top value=CONN (schematic designator TP40)
TP45 "RCU-0C" RCU-0C#1 1005,71.1 r270 top value=CONN (schematic designator TP44)
TP46 "RCU-0C" RCU-0C#1 535,413.07 r90 top value=CONN (schematic designator TP45)
TP47 "RCU-0C" RCU-0C#1 1675,2591.38 r90 top value=CONN (schematic designator TP46)
U1 "" MSOP-8 1575.89,1826.07 r0 top value=K-type (schematic designator U4)
U2 "" MSOP-8 1578.36,2154.63 r0 top value=K-type (schematic designator U4)
U3 "" TQFP64 2637.01,1400.47 r270 top (schematic designator U2)
U4 "MCP2561 CAN Transceiver" SOIC-8 2695,2100 r90 bottom value=CAN/UART (schematic designator U3)
U5 "FT232RL" SSOP-28 2800.14,654.25 r0 bottom (schematic designator U7)
U6 "REF5025" SOIC-8 762.38,176.34 r0 bottom value="2.5V Reference" (schematic designator U5)
U7 "LT1236-5 Voltage Reference" SOIC-8 592.99,641.57 r180 bottom (schematic designator U6)
U?1 "NCP1117ST33T3G" SOT-223-3 1087.78,2558.66 r180 bottom value="3.3V 1.0A" (schematic designator U?)
UART_RX1 "RCU-0C" RCU-0C#1 2502.44,598.23 r90 top
UART_TX1 "RCU-0C" RCU-0C#1 2780,405 r90 top

## Footprints (in the part's own frame and the unit in brackets; to place one, negate y for a bottom-side part, rotate by r counter-clockwise, add the part's x,y. Pads: shape width x height; smd on the part's side, far side on the other; paste and mask are expansions set on the pad)
0805_LED [mm]
  rect 1.1x1.3 smd: 1(-1.15,0) 2(1.15,0)
  silkscreen extent -2.06,-0.89 2.03,0.89, body extent -1.05,-0.67 1.05,0.67, height 0.9
"CAP 0603/1608" [mm] "Chip Capacitor, 2-Leads, Body 1.60x0.80mm, IPC Medium Density"
  rect 0.9x1 smd: 1(-0.675,0) 2(0.675,0)
  silkscreen extent -1.4,-0.7 1.4,0.7, body extent -0.8,-0.41 0.8,0.41, height 0.82
"CAP 0805/2012" [mm] "Chip Capacitor, 2-Leads, Body 2.00x1.20mm, IPC Medium Density"
  rect 1.3x1.4 smd: 1(-0.8,0) 2(0.8,0)
  silkscreen extent -1.7,-0.9 1.7,0.9, body extent -1,-0.64 1,0.64, height 1.26
HDR2X5_SMT [mm] "Header, 10-Leads, Body 3.43x6.35mm, Pitch 1.27mm"
  rect 0.76x2.4 smd: 1(-2.54,-1.95) 2(-2.54,1.95) 3(-1.27,-1.95) 4(-1.27,1.95) 5(0,-1.95) 6(0,1.95) 7(1.27,-1.95) 8(1.27,1.95) 9(2.54,-1.95) 10(2.54,1.95)
  round 0 hole 1 unplated: MH1(-1.905,0) MH2(1.905,0)
  silkscreen extent -2.66,-3.83 -2.42,-3.58, body extent -3.17,-1.72 3.17,1.72, height 4.55
MSOP-8 [mm] "MSOP, 8-Leads, Body 3.00x3.00mmPitch 0.65mm, IPC MSOP65P490X110-8N, Medium Density, LTC2053, AD8495, LT6100HMS8PBF"
  rect 0.889x0.42 smd: 1(-2.105,0.975) 2(-2.105,0.325) 3(-2.105,-0.325) 4(-2.105,-0.975) 5(2.105,-0.975) 6(2.105,-0.325) 7(2.105,0.325) 8(2.105,0.975)
  silkscreen extent -2.23,-1.55 1.15,1.86, body extent -1.55,-1.55 1.55,1.55, height 1.1
Net_Tie [mm] "Chip Resistor, 2-Leads, Body 2.00x1.25mm, IPC High Density"
  rect 0.95x1.25 smd: 1(-0.775,0) 2(0.775,0)
  Top Layer lines w0.762: -0.8,0 -0.775,0 0.8,0
  silkscreen extent -1.5,-0.8 1.5,0.8
"PTC Fuse 1206/3216" [mm]
  rect 1x1.8 smd: 1(-1.4,0) 2(1.4,0)
  silkscreen extent -2,-1 2,1, body extent -1.75,-1 1.75,1, height 1
RCU-0C#1 [mm]
  rect 1.15x2.05 smd: 1(0,0)
  body extent -0.6,-0.77 0.6,0.82, height 1.16
RCU-0C#2 [mm]
  rect 1.15x2.05 smd far side: 1(0,0)
  body extent -0.6,-0.78 0.6,0.82, height 1.16
"RES 0603/1608" [mm] "Chip Resistor, 2-Leads, Body 1.60x0.80mm, IPC Medium Density"
  rect 0.85x0.95 smd: 1(-0.65,0) 2(0.65,0)
  silkscreen extent -1.27,-0.7 1.27,0.7, body extent -0.8,-0.4 0.8,0.4, height 0.45
"RES 0805/2012" [mm] "Chip Resistor, 2-Leads, Body 2.00x1.25mm, IPC Medium Density"
  rect 1.15x1.35 smd: 1(-0.875,0) 2(0.875,0)
  silkscreen extent -1.7,-0.9 1.7,0.9, body extent -0.95,-0.62 1.05,0.63, height 0.6
SOD123F [mm] "SODFL, 2-Leads, Body 1.80x3.50mm, IPC Low Density"
  rect 1.35x1.45 smd: 1(-1.475,0) 2(1.475,0)
  silkscreen extent -0.38,-0.76 1.75,1.5, body extent -1.75,-0.95 1.75,0.95, height 1.15
SOD-128 [mm] "SOD-128, 2-Leads, Body 2.40x4.70mm, IPC Medium Density"
  rect 0.9x1.9 smd: 1(-2.175,0) 2(2.175,0)
  silkscreen extent -2.57,1.2 -2.48,1.3, body extent -2.35,-1.25 2.35,1.25, height 0.85
SOIC-8 [mm] "SOIC, 8-Leads, Body 4.90x3.90mm, Pitch 1.27mm, IPC Medium Density"
  oval 1.45x0.6 smd: 1(-2.725,1.905) 2(-2.725,0.635) 3(-2.725,-0.635) 4(-2.725,-1.905) 5(2.725,-1.905) 6(2.725,-0.635) 7(2.725,0.635) 8(2.725,1.905)
  silkscreen extent -2.85,-2.5 1.6,2.88, body extent -3,-2.5 3,2.5, height 1.75
SOT23-3 [mm] "SOT23, 3-Leads, Body 2.92x2.37mm, Pitch 0.95mm, IPC Medium Density, NUP2105L"
  rect 0.9x0.8 smd: 1(-1,0.95) 2(-1,-0.95) 3(1,0)
  silkscreen extent -1.13,-1.5 0.7,2.02, body extent -0.7,-1.52 0.7,1.52, height 1.11
"SOT-23 (TO-236)" [mm]
  rect 0.9x0.8 smd: 1(-1,0.95) 2(-1,-0.95) 3(1,0)
  silkscreen extent -1.12,-1.46 0.65,2.03, body extent -0.65,-1.46 0.65,1.46, height 1.11
SOT-223-3 [mm] "SOT223127P600-8N, NCP1117STAT3G, MMBT4403-7-F"
  rect 2x1.5 smd: 1(-3.15,2.3) 2(-3.15,0) 3(-3.15,-2.3)
  rect 2x3.8 smd: THM(3.15,0)
  silkscreen extent -3.27,-3.35 2.45,3.72, body extent -1.85,-3.35 1.85,3.35, height 1.8
SSOP-28 [mm] "hi"
  rect 1.65x0.49 smd: 1(-3.625,4.225) 2(-3.625,3.575) 3(-3.625,2.925) 4(-3.625,2.275) 5(-3.625,1.625) 6(-3.625,0.975) 7(-3.625,0.325) 8(-3.625,-0.325) 9(-3.625,-0.975) 10(-3.625,-1.625) 11(-3.625,-2.275) 12(-3.625,-2.925) 13(-3.625,-3.575) 14(-3.625,-4.225) 15(3.625,-4.225) 16(3.625,-3.575) 17(3.625,-2.925) 18(3.625,-2.275) 19(3.625,-1.625) 20(3.625,-0.975) 21(3.625,-0.325) 22(3.625,0.325) 23(3.625,0.975) 24(3.625,1.625) 25(3.625,2.275) 26(3.625,2.925) 27(3.625,3.575) 28(3.625,4.225)
  silkscreen extent -3.75,-5.25 2.4,5.25, body extent -3.9,-5.25 3.9,5.25, height 2
"Superseal 34POS" [mm]
  round 2.2 hole 1.3: A1(0,0) A2(3,0) A3(6,0) A4(9,0) A5(12,0) A6(15,0) A7(18,0) A8(21,0) A9(24,0) A10(1.5,-2.5) A11(4.5,-2.5) A12(7.5,-2.5) A13(10.5,-2.5) A14(13.5,-2.5) A15(16.5,-2.5) A16(19.5,-2.5) A17(22.5,-2.5) A18(1.5,-5.5) A19(4.5,-5.5) A20(7.5,-5.5) A21(10.5,-5.5) A22(13.5,-5.5) A23(16.5,-5.5) A24(19.5,-5.5) A25(22.5,-5.5) A26(0,-8) A27(3,-8) A28(6,-8) A29(9,-8) A30(12,-8) A31(15,-8) A32(18,-8) A33(21,-8) A34(24,-8)
  round 3.3 hole 3.3 unplated: MH(-7.25,-14.5) MH(31.25,-14.5)
  silkscreen extent -10.79,-17.91 34.67,2.54, body extent -10.75,-34 34.75,2.5, height 28.16
TECO-1981568-5_V [mm] "SMD, 5-Leads, Body 8x5.9mm, Pitch 0.65mm"
  rect 0.4x1.35 smd: 1(-1.3,0) 2(-0.65,0) 3(0,0) 4(0.65,0) 5(1.3,0)
  rect 1.6x1.4 smd: 6(-3.2,-0.225) 7(3.2,-0.225)
  rect 1.45x1.3 smd: 8(-3.425,-2.675) 9(3.425,-2.675)
  rect 1.9x1.9 smd: 10(-1.2,-2.675) 11(1.2,-2.675)
  silkscreen extent -4,-5.63 4,1.12, body extent -4,-5.5 4,0.1, height 2.79
TQFP64 [mm] "TSQFP, 64-Leads, Body 10.00x10.00mm, Pitch 0.50mm, IPC Medium Density, MKE18F512VLH16"
  rect 1.35x0.3 smd: 1(-5.75,3.75) 2(-5.75,3.25) 3(-5.75,2.75) 4(-5.75,2.25) 5(-5.75,1.75) 6(-5.75,1.25) 7(-5.75,0.75) 8(-5.75,0.25) 9(-5.75,-0.25) 10(-5.75,-0.75) 11(-5.75,-1.25) 12(-5.75,-1.75) 13(-5.75,-2.25) 14(-5.75,-2.75) 15(-5.75,-3.25) 16(-5.75,-3.75) 33(5.75,-3.75) 34(5.75,-3.25) 35(5.75,-2.75) 36(5.75,-2.25) 37(5.75,-1.75) 38(5.75,-1.25) 39(5.75,-0.75) 40(5.75,-0.25) 41(5.75,0.25) 42(5.75,0.75) 43(5.75,1.25) 44(5.75,1.75) 45(5.75,2.25) 46(5.75,2.75) 47(5.75,3.25) 48(5.75,3.75)
  rect 0.3x1.35 smd: 17(-3.75,-5.75) 18(-3.25,-5.75) 19(-2.75,-5.75) 20(-2.25,-5.75) 21(-1.75,-5.75) 22(-1.25,-5.75) 23(-0.75,-5.75) 24(-0.25,-5.75) 25(0.25,-5.75) 26(0.75,-5.75) 27(1.25,-5.75) 28(1.75,-5.75) 29(2.25,-5.75) 30(2.75,-5.75) 31(3.25,-5.75) 32(3.75,-5.75) 49(3.75,5.75) 50(3.25,5.75) 51(2.75,5.75) 52(2.25,5.75) 53(1.75,5.75) 54(1.25,5.75) 55(0.75,5.75) 56(0.25,5.75) 57(-0.25,5.75) 58(-0.75,5.75) 59(-1.25,5.75) 60(-1.75,5.75) 61(-2.25,5.75) 62(-2.75,5.75) 63(-3.25,5.75) 64(-3.75,5.75)
  silkscreen extent -5.87,-4.67 4.67,4.68, body extent -5,-5 5,5, height 1.6

## Part data
12V CANH CANL CANRX CANTX OVP_G1 PWR_IN TEST_USBD_N1 TEST_USBD_P1 UART_RX1 UART_TX1: library part 5, Manufacturer_id=1, Package=0603, ComponentLink1Description=Datasheet, ComponentLink1URL=https://www.te.com/commerce/DocumentDelivery/DDEController?Action=srchrtrv&DocNm=1773266&DocType=DS&DocLang=English, Drawer_id=1, idTable=5, Link=https://www.digikey.com/product-detail/en/te-connectivity-amp-connectors/RCU-0C/A106145CT-ND/3477802, MfrPartNo=RCU-0C, Name=RCU-0C_Test_Point
C1 C2 C5 C6: library part 193, Dielectric=Ceramic, Manufacturer_id=1, Package="CAP 0603/1608", Voltage_Rating=16V, Created_By="Nick Mah", Created_Date=10/20/2018, Drawer_id=1, idCapacitor=193, Name="Cap_1000pf_16V_CAP 0603/1608"
C3 C4: library part 217, Dielectric=Ceramic, Manufacturer_id=1, Package="CAP 0603/1608", Voltage_Rating=16V, Created_By="Nick Mah", Created_Date=10/20/2018, Drawer_id=1, idCapacitor=217, Name="Cap_0.010uf_16V_CAP 0603/1608"
C7 C11 C14 C18 C19: library part 583, Dielectric=Ceramic, Manufacturer_id=1, Package="CAP 0603/1608", Voltage_Rating=25V, Created_By="Nick Mah", Created_Date=10/20/2018, Drawer_id=1, idCapacitor=583, Name="Cap_0.10uf_25V_CAP 0603/1608"
C8 C21 C22: library part 223, Dielectric=Ceramic, Manufacturer_id=1, Package="CAP 0603/1608", Voltage_Rating=16V, Created_By="Nick Mah", Created_Date=10/20/2018, Drawer_id=1, idCapacitor=223, Name="Cap_0.10uf_16V_CAP 0603/1608"
C9: library part 943, Dielectric=Ceramic, Manufacturer_id=1, Package="CAP 0603/1608", Voltage_Rating=50V, Created_By="Nick Mah", Created_Date=10/20/2018, Drawer_id=1, idCapacitor=943, Name="Cap_0.10uf_50V_CAP 0603/1608"
C10 C13: library part 589, Dielectric=Ceramic, Manufacturer_id=1, Package="CAP 0603/1608", Voltage_Rating=25V, Created_By="Nick Mah", Created_Date=10/20/2018, Drawer_id=1, idCapacitor=589, Name="Cap_1.0uf_25V_CAP 0603/1608"
C12: library part 929, Dielectric=Ceramic, Manufacturer_id=1, Package="CAP 0603/1608", Voltage_Rating=50V, Created_By="Nick Mah", Created_Date=10/20/2018, Drawer_id=1, idCapacitor=929, Name="Cap_4700pf_50V_CAP 0603/1608"
C15: library part 529, Dielectric=Ceramic, Manufacturer_id=1, Package="CAP 0603/1608", Voltage_Rating=25V, Created_By="Nick Mah", Created_Date=10/20/2018, Drawer_id=1, idCapacitor=529, Name="Cap_100pf_25V_CAP 0603/1608"
C16 C20: library part 591, Dielectric=Ceramic, Manufacturer_id=1, Package="CAP 0603/1608", Voltage_Rating=25V, Created_By="Nick Mah", Created_Date=10/20/2018, Drawer_id=1, idCapacitor=591, Name="Cap_2.2uf_25V_CAP 0603/1608"
C17: library part 237, Dielectric=Ceramic, Manufacturer_id=1, Package="CAP 0603/1608", Voltage_Rating=16V, Created_By="Nick Mah", Created_Date=10/20/2018, Drawer_id=1, idCapacitor=237, Name="Cap_22uf_16V_CAP 0603/1608"
C23 C24 C25 C26 C27 C28 C29 C30: library part 578, Dielectric=Ceramic, Manufacturer_id=1, Package="CAP 0603/1608", Voltage_Rating=25V, Created_By="Nick Mah", Created_Date=10/20/2018, Drawer_id=1, idCapacitor=578, Name="Cap_0.015uf_25V_CAP 0603/1608"
C31 C32: library part 711, Dielectric=Ceramic, Manufacturer_id=1, Package="CAP 0805/2012", Voltage_Rating=25V, Created_By="Nick Mah", Created_Date=10/20/2018, Drawer_id=1, idCapacitor=711, Name="Cap_2.2uf_25V_CAP 0805/2012"
D1 D3 POW: library part 2, Manufacturer_id=1, Package=0805, Brightness=7mcd, Drawer_id=1, Id=20mA, idLED=2, Link=https://www.digikey.com/product-detail/en/visual-communications-company-vcc/CMD17-21VGD-TR8/L62505CT-ND/254936, Name=CMD17_0805_GREEN, Vf=2.1V
D2: library part 1, Package=0805, Drawer_id=1, idLED=1, Manufacturer_id=1, Name=LED_0805_RED, Vf=0.7V
D4: library part 7, "ESD Protection Diode", Manufacturer_id=1, Package=SOT-23, Power=350W, Supplier1PartNo=NUP1105LT1GOSCT-ND, ComponentLink1URL=https://www.digikey.com/product-detail/en/on-semiconductor/NUP1105LT1G/NUP1105LT1GOSCT-ND/2122067, Drawer_id=1, Ic=8A, idDiode=7, Link=https://www.digikey.com/product-detail/en/on-semiconductor/NUP1105LT1G/NUP1105LT1GOSCT-ND/2122067, MfrPartNo=NUP1105LT1G, Name=SOT-23_350W_Zener, Num_Circuits=1, Supplier1=Digikey, Type=Zener
D5: library part 10, "Zener Diode 14V 500mW ±5% Surface Mount SOD-123", Manufacturer_id=8, Package=SOD-123, Power=500mW, Supplier1PartNo=DDZ9701-7DICT-ND, ComponentLink1Description=Datasheet, ComponentLink1URL=https://www.diodes.com/assets/Datasheets/ds30410.pdf, Drawer_id=1, idDiode=10, Link=https://www.digikey.com/product-detail/en/diodes-incorporated/DDZ9701-7/DDZ9701-7DICT-ND/3877402, MfrPartNo=DDZ9701-7, Name=DDZ9701, Num_Circuits=1, Supplier1=Digi-Key, Type=Zener
D6: library part 12, "DIODE SCHOTTKY 30V 5A TMINIP2", Manufacturer_id=1, MfrPartNo=DB2431200L, Package=SOD-128, Power=30V, Supplier1PartNo=DB2431200LCT-ND, ComponentLink1Description=Datasheet, ComponentLink1URL=https://industrial.panasonic.com/content/data/SC/ds/ds4/DB2431200L_E.pdf, Drawer_id=1, Ic=5A, idDiode=12, Link=https://www.digikey.com/product-detail/en/panasonic-electronic-components/DB2431200L/DB2431200LCT-ND/3884430, Name=DB2431200L, Num_Circuits=1, Supplier1=Digi-Key, Type=Schottky
F1: library part 5, "Fuse", Manufacturer_id=1, MfrPartNo=1206L050/15YR, Created_By=Angel, Created_Date=10/27/2018, Drawer_id=1, I_hold=500mA, I_max=100A, I_trip=1A, idFuse=5, LatestRevisionDate=17-Jul-2002, LatestRevisionNote="Re-released for DXP Platform.", Link=https://www.digikey.com/product-detail/en/littelfuse-inc/1206L050-15YR/F3733CT-ND/2486168, Name="PTC Poly Fuse Resettable", PackageDescription="Thru-Hole; 2 Leads", PackageReference=PIN-W2/E2.8, Pd_Typ=600mW, Published=8-Jun-2000, Publisher="Altium Limited", V_max=15V
IC1 IC2 IC3 IC4 IC5 IC6 IC7 IC8: library part 2, Manufacturer_id=1, MfrPartNo=LTC2053, Package=MSOP8, Supply_Voltage="2.7V to ±5.5V", Amplifier_Type=Instrumentation, Created_By="Angel Delgado", Drawer_id=1, idOp_Amp=2, Link=https://www.digikey.com/product-detail/en/linear-technology-analog-devices/LTC2053CMS8-TRPBF/LTC2053CMS8-TRPBFCT-ND/5892339, Name="Instrumentation Amplifier", Num_Circuits=1
J1: library part 11, "Connector Header Through Hole, Right Angle 34 position 0.118\" (3.00mm)", Manufacturer_id=5, MfrPartNo=6437288-1, Supplier1PartNo=A124384-ND, Voltage_Rating=250VDC, ComponentLink1Description=Datasheet, ComponentLink1URL=https://www.te.com/commerce/DocumentDelivery/DDEController?Action=srchrtrv&DocNm=6437288-1&DocType=Customer+Drawing&DocLang=Japanese, Drawer_id=1, idConn=11, Link=https://www.digikey.com/products/en?mpart=6437288-1&&csp=WT.z_cid%3Dsp_8004_20120425_buynow%26TE_cid%3D8004-1541898693362, Name="AMP Superseal 34 POS", Num_Contacts=34, Num_Rows=4, Pitch=3mm, Supplier1=Digi-Key
J2: library part 5, "USB Micro Type B", Manufacturer_id=1, ComponentLink1Description=Datasheet, Created_By=Aiku, Created_Date=10/20/2018, Drawer_id=1, idConn=5, Link=https://www.mouser.com/ProductDetail/TE-Connectivity-AMP/1981568-1?qs=sGAEpiMZZMulM8LPOQ%252bykzEIUPbUCiSfqsfxH3Oq%252bYo%3d, MfrPartNo=1981568-1, Name="TE USB Micro", Num_Contacts=5, Supplier1=TE
N1 U3: library part 1, Drawer_id=1, Manufacturer_id=1
  N1: idFuse=3, idShunt=1, Name="Net Tie"
  U3: idMCU=1, Name="MKE18F512VLH16 MCU"
P1: library part 4, "2 row connector", Manufacturer_id=1, Voltage_Rating=None, ComponentLink1Description=Datasheet, Created_By=Aiku, Drawer_id=1, idConn=4, Link=https://www.digikey.com/product-detail/en/5103309-1/A33160-ND/1114898?utm_campaign=buynow&WT.z_cid=ref_octopart_dkc_buynow&utm_medium=aggregator&curr=usd&site=us&utm_source=octopart, MfrPartNo=5103309-1, Name=CONN_TE_2X5POS, Num_Contacts=10, Num_Rows=2, Pitch=2.54mm
R1 R2 R5 R6: library part 2317, Manufacturer_id=1, Package=0603, Power=1/10W, Tolerance=10%, ComponentLink1Description=Datasheet, Created_By="Nick Mah", Created_Date=2018-10-20, Drawer_id=1, idResistor=2317, Name=Res_10k_0603_1/10W_10%, Supplier 1=Digi-Key
R3 R4: library part 1441, Manufacturer_id=1, Package=0603, Power=1/10W, Tolerance=5%, ComponentLink1Description=Datasheet, Created_By="Nick Mah", Created_Date=2018-10-20, Drawer_id=1, idResistor=1441, Name=Res_1.0M_0603_1/10W_5%, Supplier 1=Digi-Key
R7 R8 R11 R12: library part 721, Manufacturer_id=1, Package=0805, Power=1/4W, Tolerance=1%, ComponentLink1Description=Datasheet, Created_By="Nick Mah", Created_Date=2018-10-20, Drawer_id=1, idResistor=721, Name=Res_1.0k_0805_1/4W_1%, Supplier 1=Digi-Key
R9 R16 R18 R19 R20 R21 R22 R23 R24: library part 313, Manufacturer_id=1, Package=0603, Power=1/10W, Tolerance=1%, ComponentLink1Description=Datasheet, Created_By="Nick Mah", Created_Date=2018-10-20, Drawer_id=1, idResistor=313, Name=Res_10k_0603_1/10W_1%, Supplier 1=Digi-Key
R10: library part 1393, Manufacturer_id=1, Package=0603, Power=1/10W, Tolerance=5%, ComponentLink1Description=Datasheet, Created_By="Nick Mah", Created_Date=2018-10-20, Drawer_id=1, idResistor=1393, Name=Res_10k_0603_1/10W_5%, Supplier 1=Digi-Key
R13: library part 2293, Manufacturer_id=1, Package=0603, Power=1/10W, Tolerance=10%, ComponentLink1Description=Datasheet, Created_By="Nick Mah", Created_Date=2018-10-20, Drawer_id=1, idResistor=2293, Name=Res_100_0603_1/10W_10%, Supplier 1=Digi-Key
R14 R15: library part 1340, Manufacturer_id=1, Package=0603, Power=1/10W, Tolerance=5%, ComponentLink1Description=Datasheet, Created_By="Nick Mah", Created_Date=2018-10-20, Drawer_id=1, idResistor=1340, Name=Res_62_0603_1/10W_5%, Supplier 1=Digi-Key
R17 R25 R26 R27 R28 R29 R30 R31: library part 241, Manufacturer_id=1, Package=0603, Power=1/10W, Tolerance=1%, ComponentLink1Description=Datasheet, Created_By="Nick Mah", Created_Date=2018-10-20, Drawer_id=1, idResistor=241, Name=Res_10_0603_1/10W_1%, Supplier 1=Digi-Key
R32 R33: library part 497, Manufacturer_id=1, Package=0805, Power=1/10W, Tolerance=1%, ComponentLink1Description=Datasheet, Created_By="Nick Mah", Created_Date=2018-10-20, Drawer_id=1, idResistor=497, Name=Res_470_0805_1/10W_1%, Supplier 1=Digi-Key
R34: library part 545, Manufacturer_id=1, Package=0805, Power=1/10W, Tolerance=1%, ComponentLink1Description=Datasheet, Created_By="Nick Mah", Created_Date=2018-10-20, Drawer_id=1, idResistor=545, Name=Res_47k_0805_1/10W_1%, Supplier 1=Digi-Key
T1: library part 6, "MOSFET N-CHANNEL 30V 5A SOT23", Manufacturer_id=1, Package=SOT-23, Created_By=Angel, Drawer_id=1, Id=2.8A, idFETs=6, Link=https://www.digikey.com/product-detail/en/diodes-incorporated/DMG2302UK-7/DMG2302UK-7DICT-ND/6010163, MfrPartNo=DMG2302UK-7, Name=DMG2302UK-7, Num_Circuits=1, Rds_On=90mOhm, Supplier1=Digi-Key, Vdss=20V, Vgs(Max)=1V, Vgs(typ)=800mV
TP1 TP2 TP3 TP4 TP5 TP6 TP7 TP8 TP9 TP10 TP11 TP12 TP13 TP14 TP15 TP16 TP17 TP18 TP19 TP20 TP21 TP22 TP23 TP24 TP25 TP26 TP27 TP28 TP29 TP30 TP31 TP32 TP33 TP34 TP35 TP36 TP37 TP38 TP39 TP40 TP41 TP42 TP43 TP44 TP45 TP46 TP47: library part 14, "Test point", Manufacturer_id=1, Supplier1PartNo=None, ComponentLink1Description=Null, ComponentLink1URL=Null, Created_By=Graydon, Created_Date=11/10/2018, Drawer_id=1, idConn=14, Link=https://www.digikey.com/product-detail/en/te-connectivity-amp-connectors/RCU-0C/A106145CT-ND/3477802, MfrPartNo=RCU-0C, Name=RCU-0C, Num_Contacts=1, Num_Rows=1, Package=RCU-0C, Supplier1=None, Updated_By=Null
U1 U2: library part 3, "IC THRMOCPLE COLD JNC COMP 8MSOP", Manufacturer_id=1, MfrPartNo=AD8494CRMZ, Package=MSOP8, Supplier1PartNo=AD8494CRMZ-ND, Supply_Voltage=+-18,2.7-36, Amplifier_Type="Thermocouple Amplifier", ComponentLink1Description=Datasheet, ComponentLink1URL=http://www.digchip.com/data/041/041-93390-AD8494.pdf, Created_By="Nick Mah", Drawer_id=1, idOp_Amp=3, Link=https://www.digikey.com/product-detail/en/analog-devices-inc/AD8494CRMZ/AD8494CRMZ-ND/2606669, Name="AD8494 Thermocouple Amplifier", Num_Circuits=1, Supplier1=Digi-Key
U4: library part 5, Manufacturer_id=1, MfrPartNo=MCP2561, Package=SOIC-8, Created_By="Angel Delgado", Data_Rate=1Mbps, Drawer_id=1, idIC_Interface=5, Link=https://www.digikey.com/product-detail/en/microchip-technology/MCP2561T-E-SN/MCP2561T-E-SNCT-ND/5148846, Name="CAN Transceiver", Num_Circuits=1, Protocol=CAN, Type=Transceiver, Vin(Max)=5.5V, Vin(Min)=4.5V
U5: library part 3, Manufacturer_id=1, Created_By=Kyle, Drawer_id=1, idIC_Interface=3, Link=https://www.digikey.com/product-detail/en/ftdi-future-technology-devices-international-ltd/FT232RL-REEL/768-1007-1-ND/1836402, MfrPartNo=FT232RL, Name="USB FTDI", Protocol=UART, Vin(Max)=5.25, Vin(Min)=3.3
U6: library part 9, "Series Voltage Reference IC ±0.1% 10mA 8-SOIC", Current_Rating=10mA, Dropout_Voltage=200mV, Manufacturer_id=1, MfrPartNo=REF5025AIDR, Package=SOIC-8, Power=Reference, Supplier1PartNo=296-39165-2-ND, ComponentLink1Description=Datasheet, ComponentLink1URL=http://www.ti.com/lit/ds/symlink/ref5020.pdf, Drawer_id=1, idPMIC_Lin=9, Link=https://www.digikey.com/product-detail/en/texas-instruments/REF5025AIDR/296-39165-2-ND/1900163, Name=REF5025_2.5V_Reg, Num_Outputs=1, Supplier1=Digi-Key, Vin(Max)=18V, Vin(Min)=2.7V, Vout(Max)=2.5V, Vout(Min)=2.5V, Vout_Type=Fixed
U7: library part 2, Manufacturer_id=1, Drawer_id=1, idIC_Misc=2, Name="Voltage Ref LT1236-5"
U?1: library part 15, "1.0 A Low Dropout Positive and Adjustable Voltage Regulator", Current_Rating=1A, Dropout_Voltage="1.2V @ 800mA", Manufacturer_id=1, Package=SOT-223-3, Drawer_id=1, idPMIC_Lin=15, Link=https://www.digikey.com/product-detail/en/on-semiconductor/NCP1117ST33T3G/NCP1117ST33T3GOSCT-ND/660708?utm_adgroup=Integrated%20Circuits&slid=&gclid=CjwKCAjwpKveBRAwEiwAo4Pqm-q33kFM8zFNc6HZ2F-pR13_ETd6YlqjCAqcJjAXoyQWdArbQQWp4hoCk3EQAvD_BwE, MfrPartNo=NCP1117ST33T3G, Name="3.3V 1.0A LDO", Num_Outputs=1, Vin(Max)=20V, Vout(Max)=3.3V

## Free pads (board coordinates)
  round 196.85 hole 137.8: 1(300,300) 1(300,2500) 1(3200,300) 1(3200,2500)

## Via types
v1: diameter 30, hole 15, Top Layer to Bottom Layer, 106 vias
v2: diameter 45, hole 20, Top Layer to Bottom Layer, 22 vias

## Nets (pads, with @x,y where several pads share a name; then routed paths per layer and width w, separated by ;. In a path a pad name is that pad's centre, name@x,y a point inside that pad or via, vN(x,y) a via of type N, cw(c..) or ccw(c..) an arc to the next point about the centre after c; other vN are vias at no path point)
2.5VREF: C17.2 IC1.5 IC2.5 IC3.5 IC4.5 IC5.5 IC6.5 IC7.5 IC8.5 R17.1 R25.1 R26.1 R27.1 R28.1 R29.1 R30.1 R31.1 TP45.1 U6.6 | length 4144.9
  Top Layer w15: v2(990,137.13) 990,86.1 TP45.1@1005,71.1 ; IC1.5@1663.88,133.19 1663.88,93.76 v1(1665.51,92.12) ; IC2.5@1663.88,343.19 1663.88,303.76 v1(1665.51,302.12) ; IC3.5@1663.88,548.19 1663.88,508.76 v1(1665.51,507.12) ; IC4.5@1663.88,753.19 1663.88,713.76 v1(1665.51,712.12) ; IC5.5@1663.88,958.19 1663.88,918.76 v1(1665.51,917.12) ; IC6.5@1663.88,1173.19 1663.88,1133.76 v1(1665.51,1132.12) ; IC7.5@1663.88,1598.19 1663.88,1558.76 v1(1665.51,1557.12) ; IC8.5@1668.88,1383.19 1668.88,1343.76 v1(1670.51,1342.12)
  Bottom Layer w15: U6.6@869.67,201.34 C17.2@996.36,201.34 990,194.98 v2(990,137.13) 1007.87,137.13 1115,30 1603.39,30 1662.64,89.25 1652.74,89.25 1650.34,86.85 R25.1@1611.1,86.85 ; R26.1@1611.1,296.85 1650.34,296.85 1652.74,299.25 1742.09,299.25 ; R27.1@1611.1,501.85 1650.34,501.85 1652.74,504.25 1728.5,504.25 ; R28.1@1611.1,706.85 1650.34,706.85 1652.74,709.25 1745.11,709.25 ; R29.1@1611.1,911.85 1650.34,911.85 1652.74,914.25 1748.98,914.25 ; R30.1@1611.1,1126.85 1650.34,1126.85 1652.74,1129.25 1742.05,1129.25 ; R31.1@1611.1,1551.85 1650.34,1551.85 1652.74,1554.25 1745.75,1554.25 1800,1500 1800,1405.58 1743.98,1349.55 1738.8,1349.55 1728.5,1339.25 ; R17.1@1616.1,1336.85 1655.34,1336.85 1657.74,1339.25 1728.5,1339.25 ; v1(1665.51,92.12) 1731.54,92.12 1790,150.58 1790,251.34 1742.09,299.25 ; 1728.5,504.25 1738.8,514.55 1738.98,514.55 1790,565.58 1790,664.36 1745.11,709.25 ; 1728.5,504.25 1790,442.75 1790,347.16 1742.09,299.25 ; 1728.5,1339.25 1737.05,1339.25 1791.3,1285 1791.3,1178.5 1742.05,1129.25 ; 1742.05,1129.25 1791.3,1080 1791.3,956.57 1748.98,914.25 ; 1745.11,709.25 1795,759.14 1795,868.23 1748.98,914.25
12V_Unfused: F1.1 J1.A26 PWR_IN.1 | length 1113.5
  Top Layer w10: PWR_IN.1@160,2715 172.94,2715 134.09,2676.16 134.09,2336.49 390,2080.58 J1.A26@390,1872.44
  Bottom Layer w40: J1.A26@390,1872.44 390,1882.7 468.19,1960.89 F1.1@483.31,1960.89